# Altium PCB LCT M3 PCB.PcbDoc (part 1 of 2)
Units mm, origin at the board's own origin, x right, y up, seen from the top; angles counter-clockwise.
Board outline 112 x 147.95 mm, 6 copper layers (Top, Gnd, HighSpeed, High speed, Power, Bottom), stack 2.576 mm thick; 249 components, 161 nets, 810 pads, 262 vias.
Unrouted connection lines stored in the file: 3.
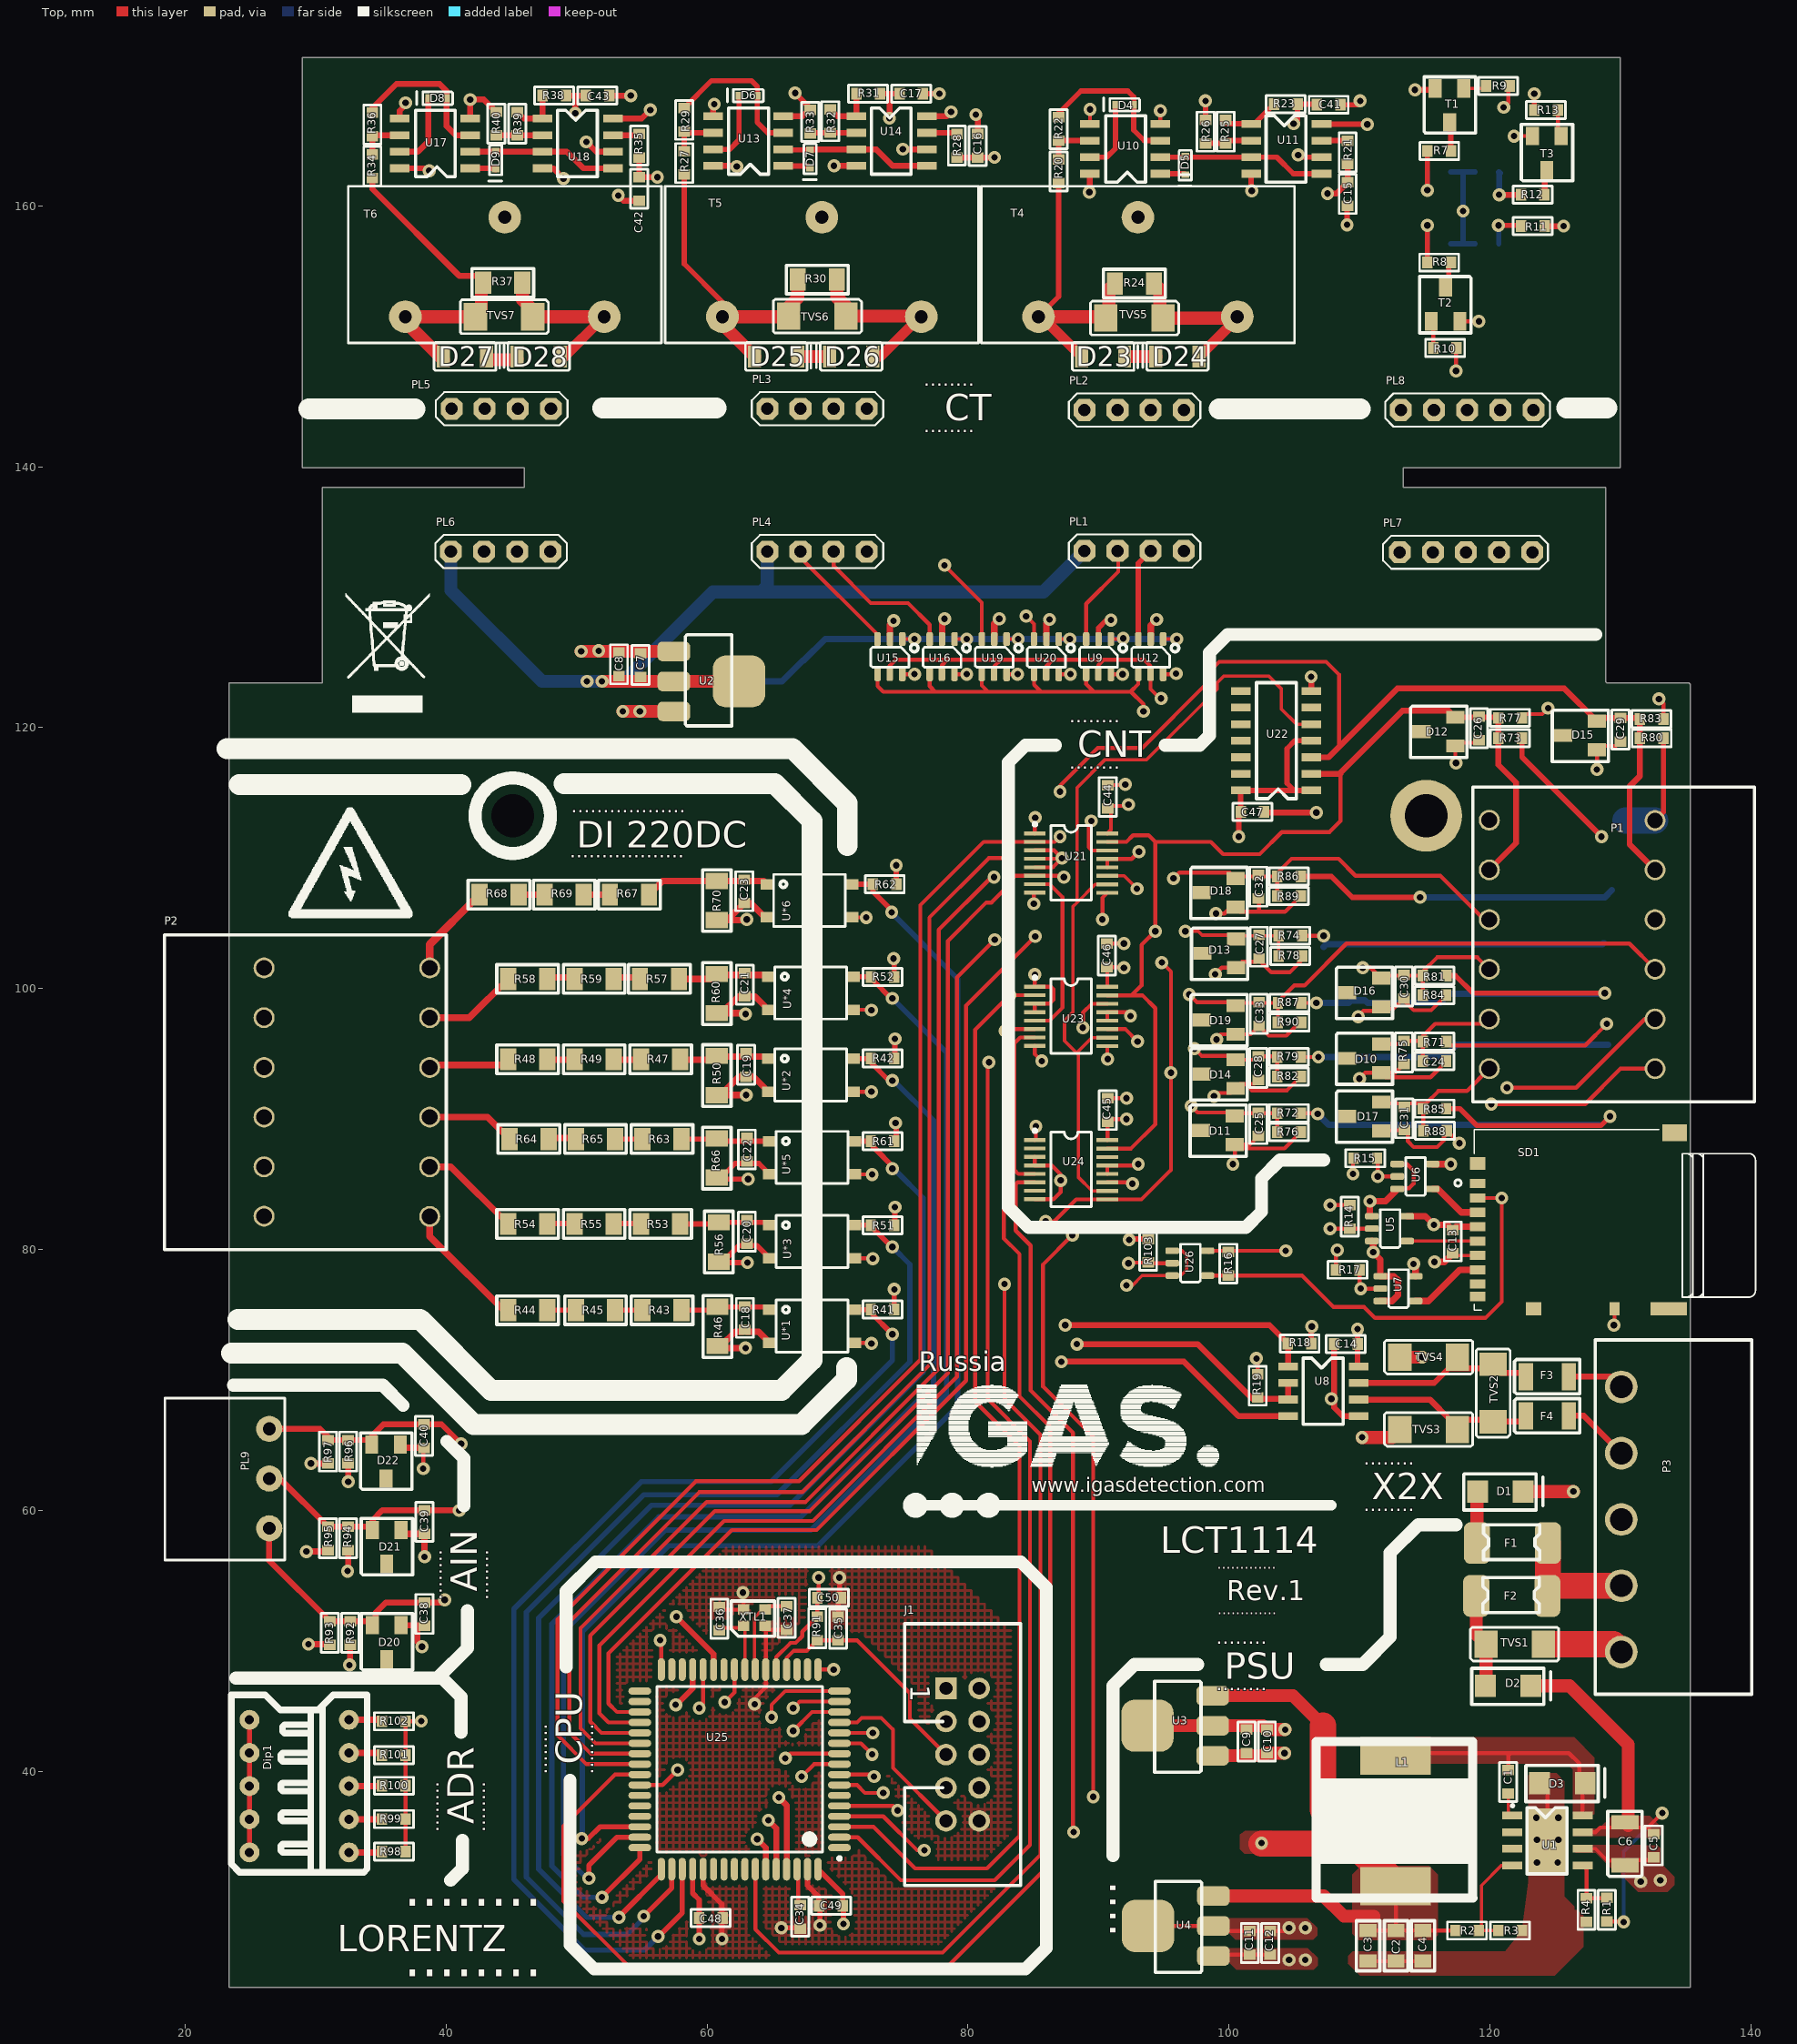
[diagram p0: Top view]
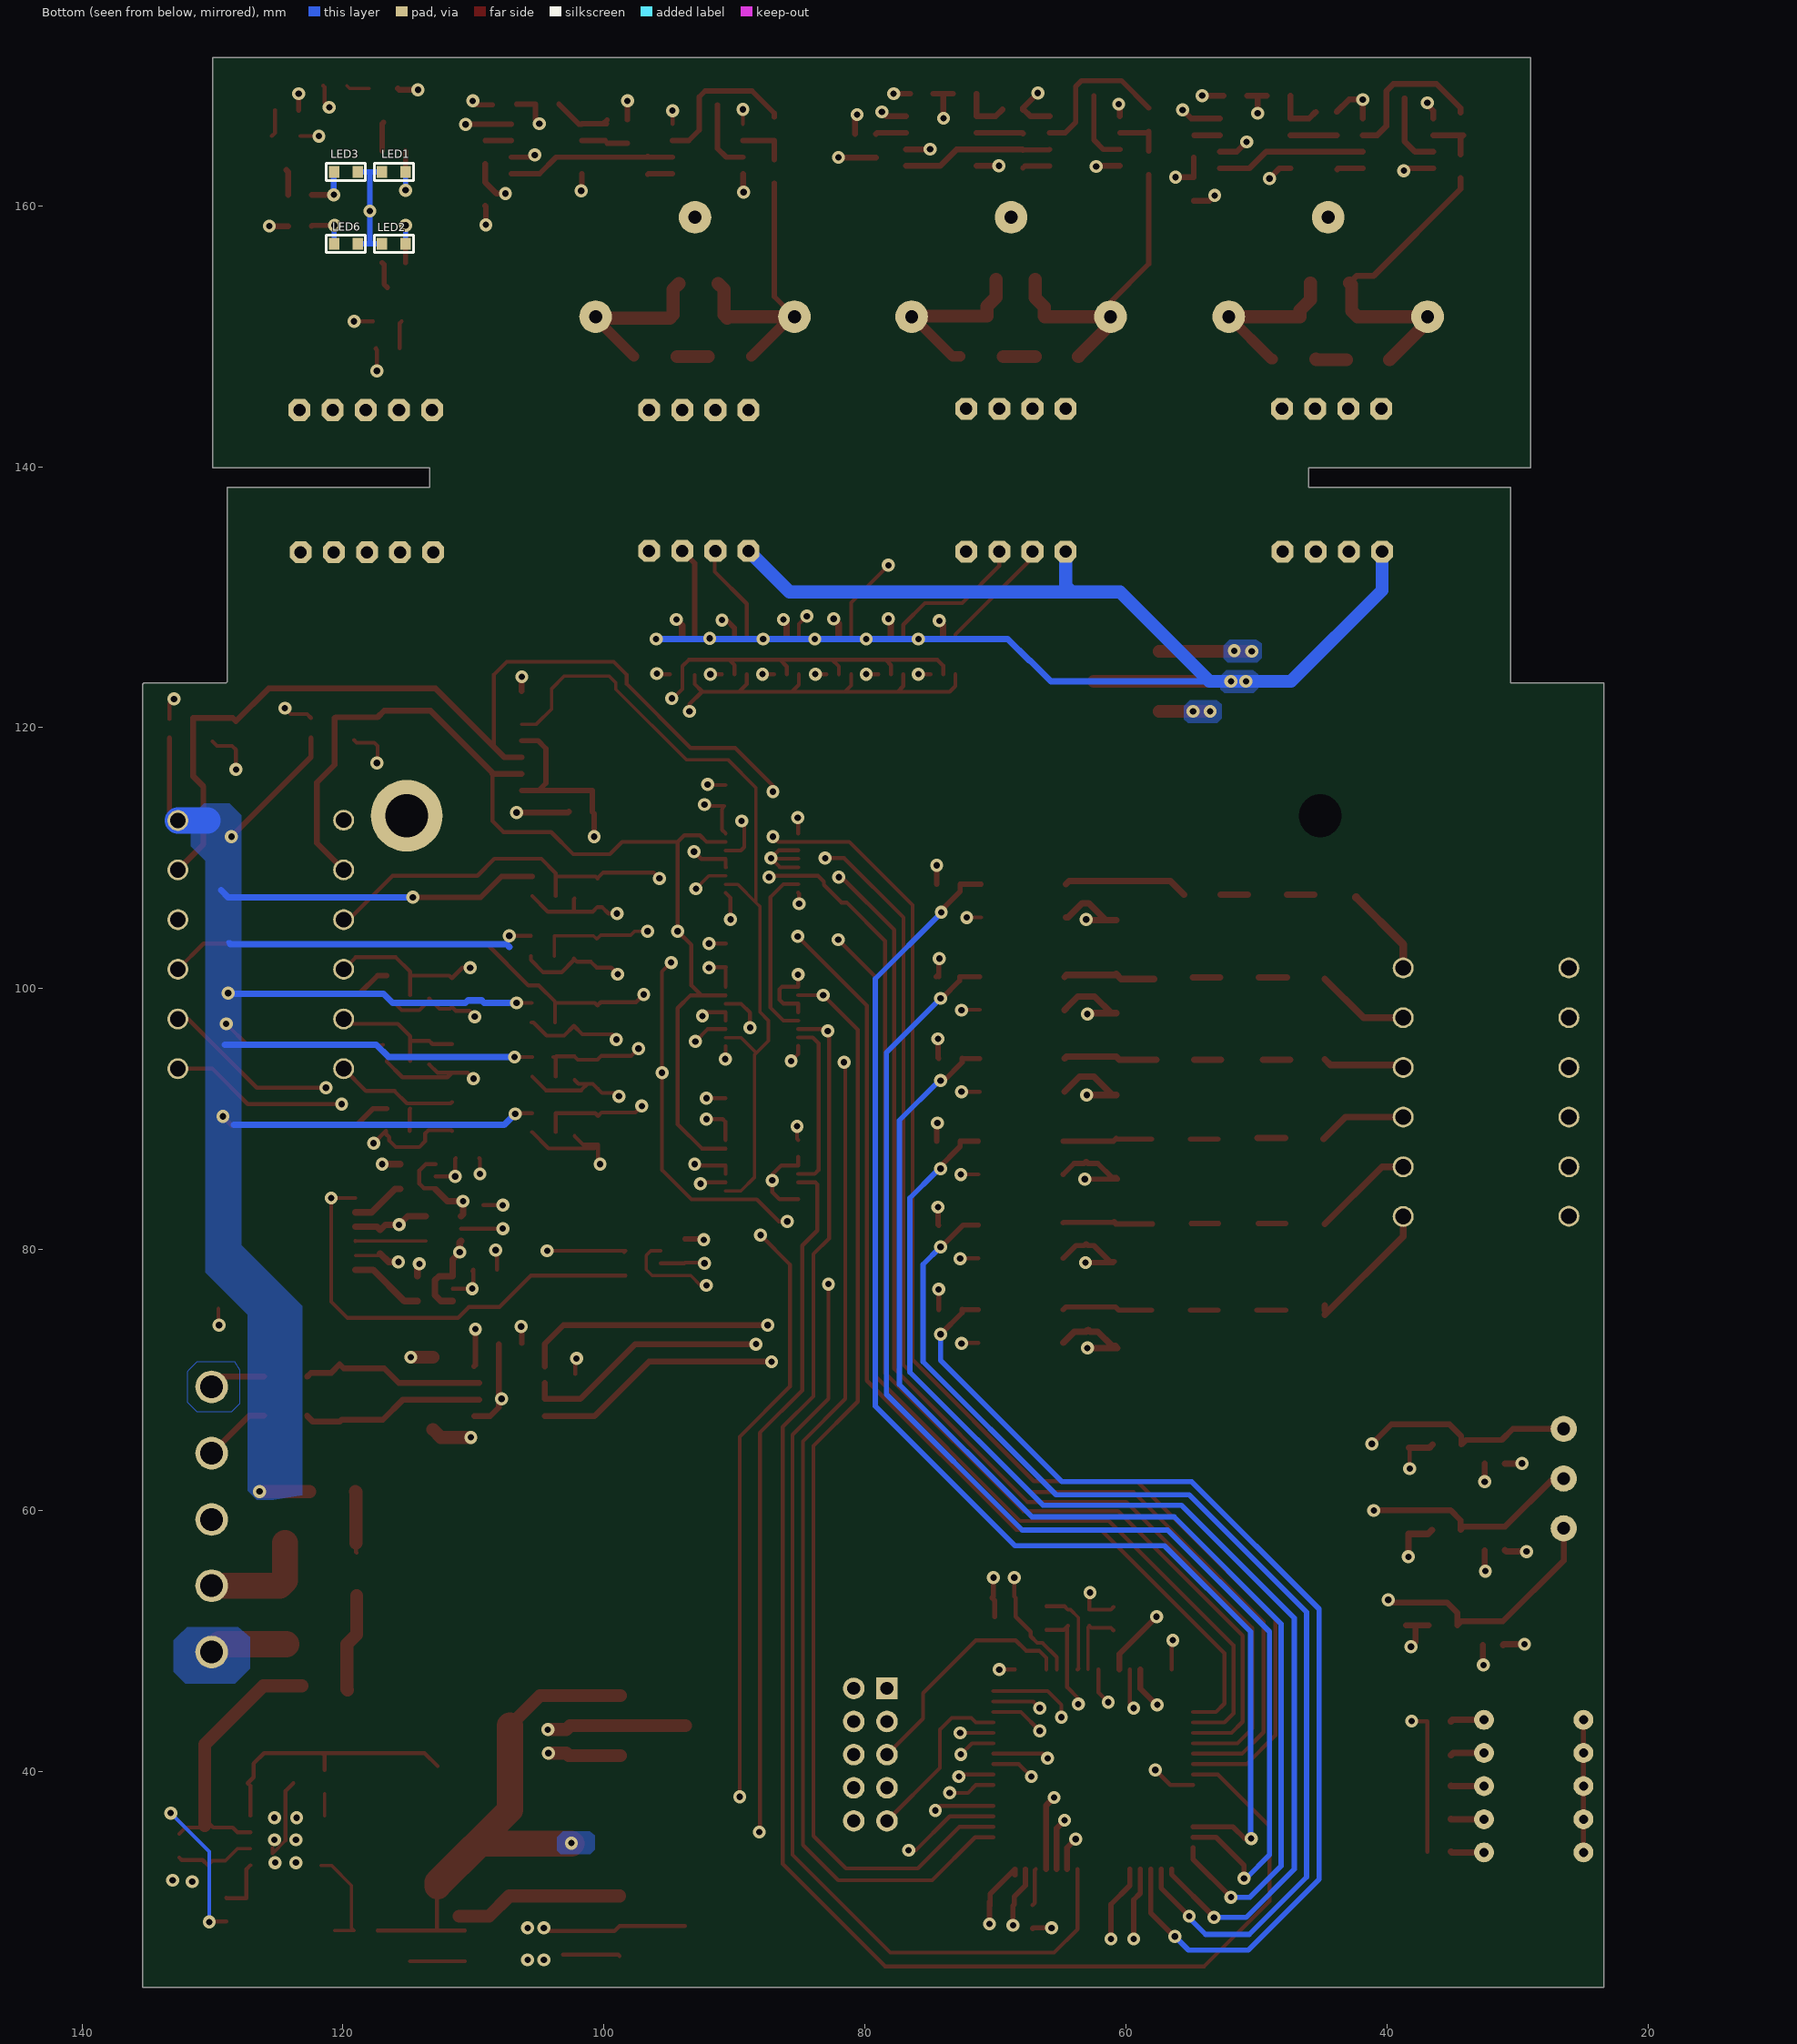
[diagram p1: Bottom view, seen from below]
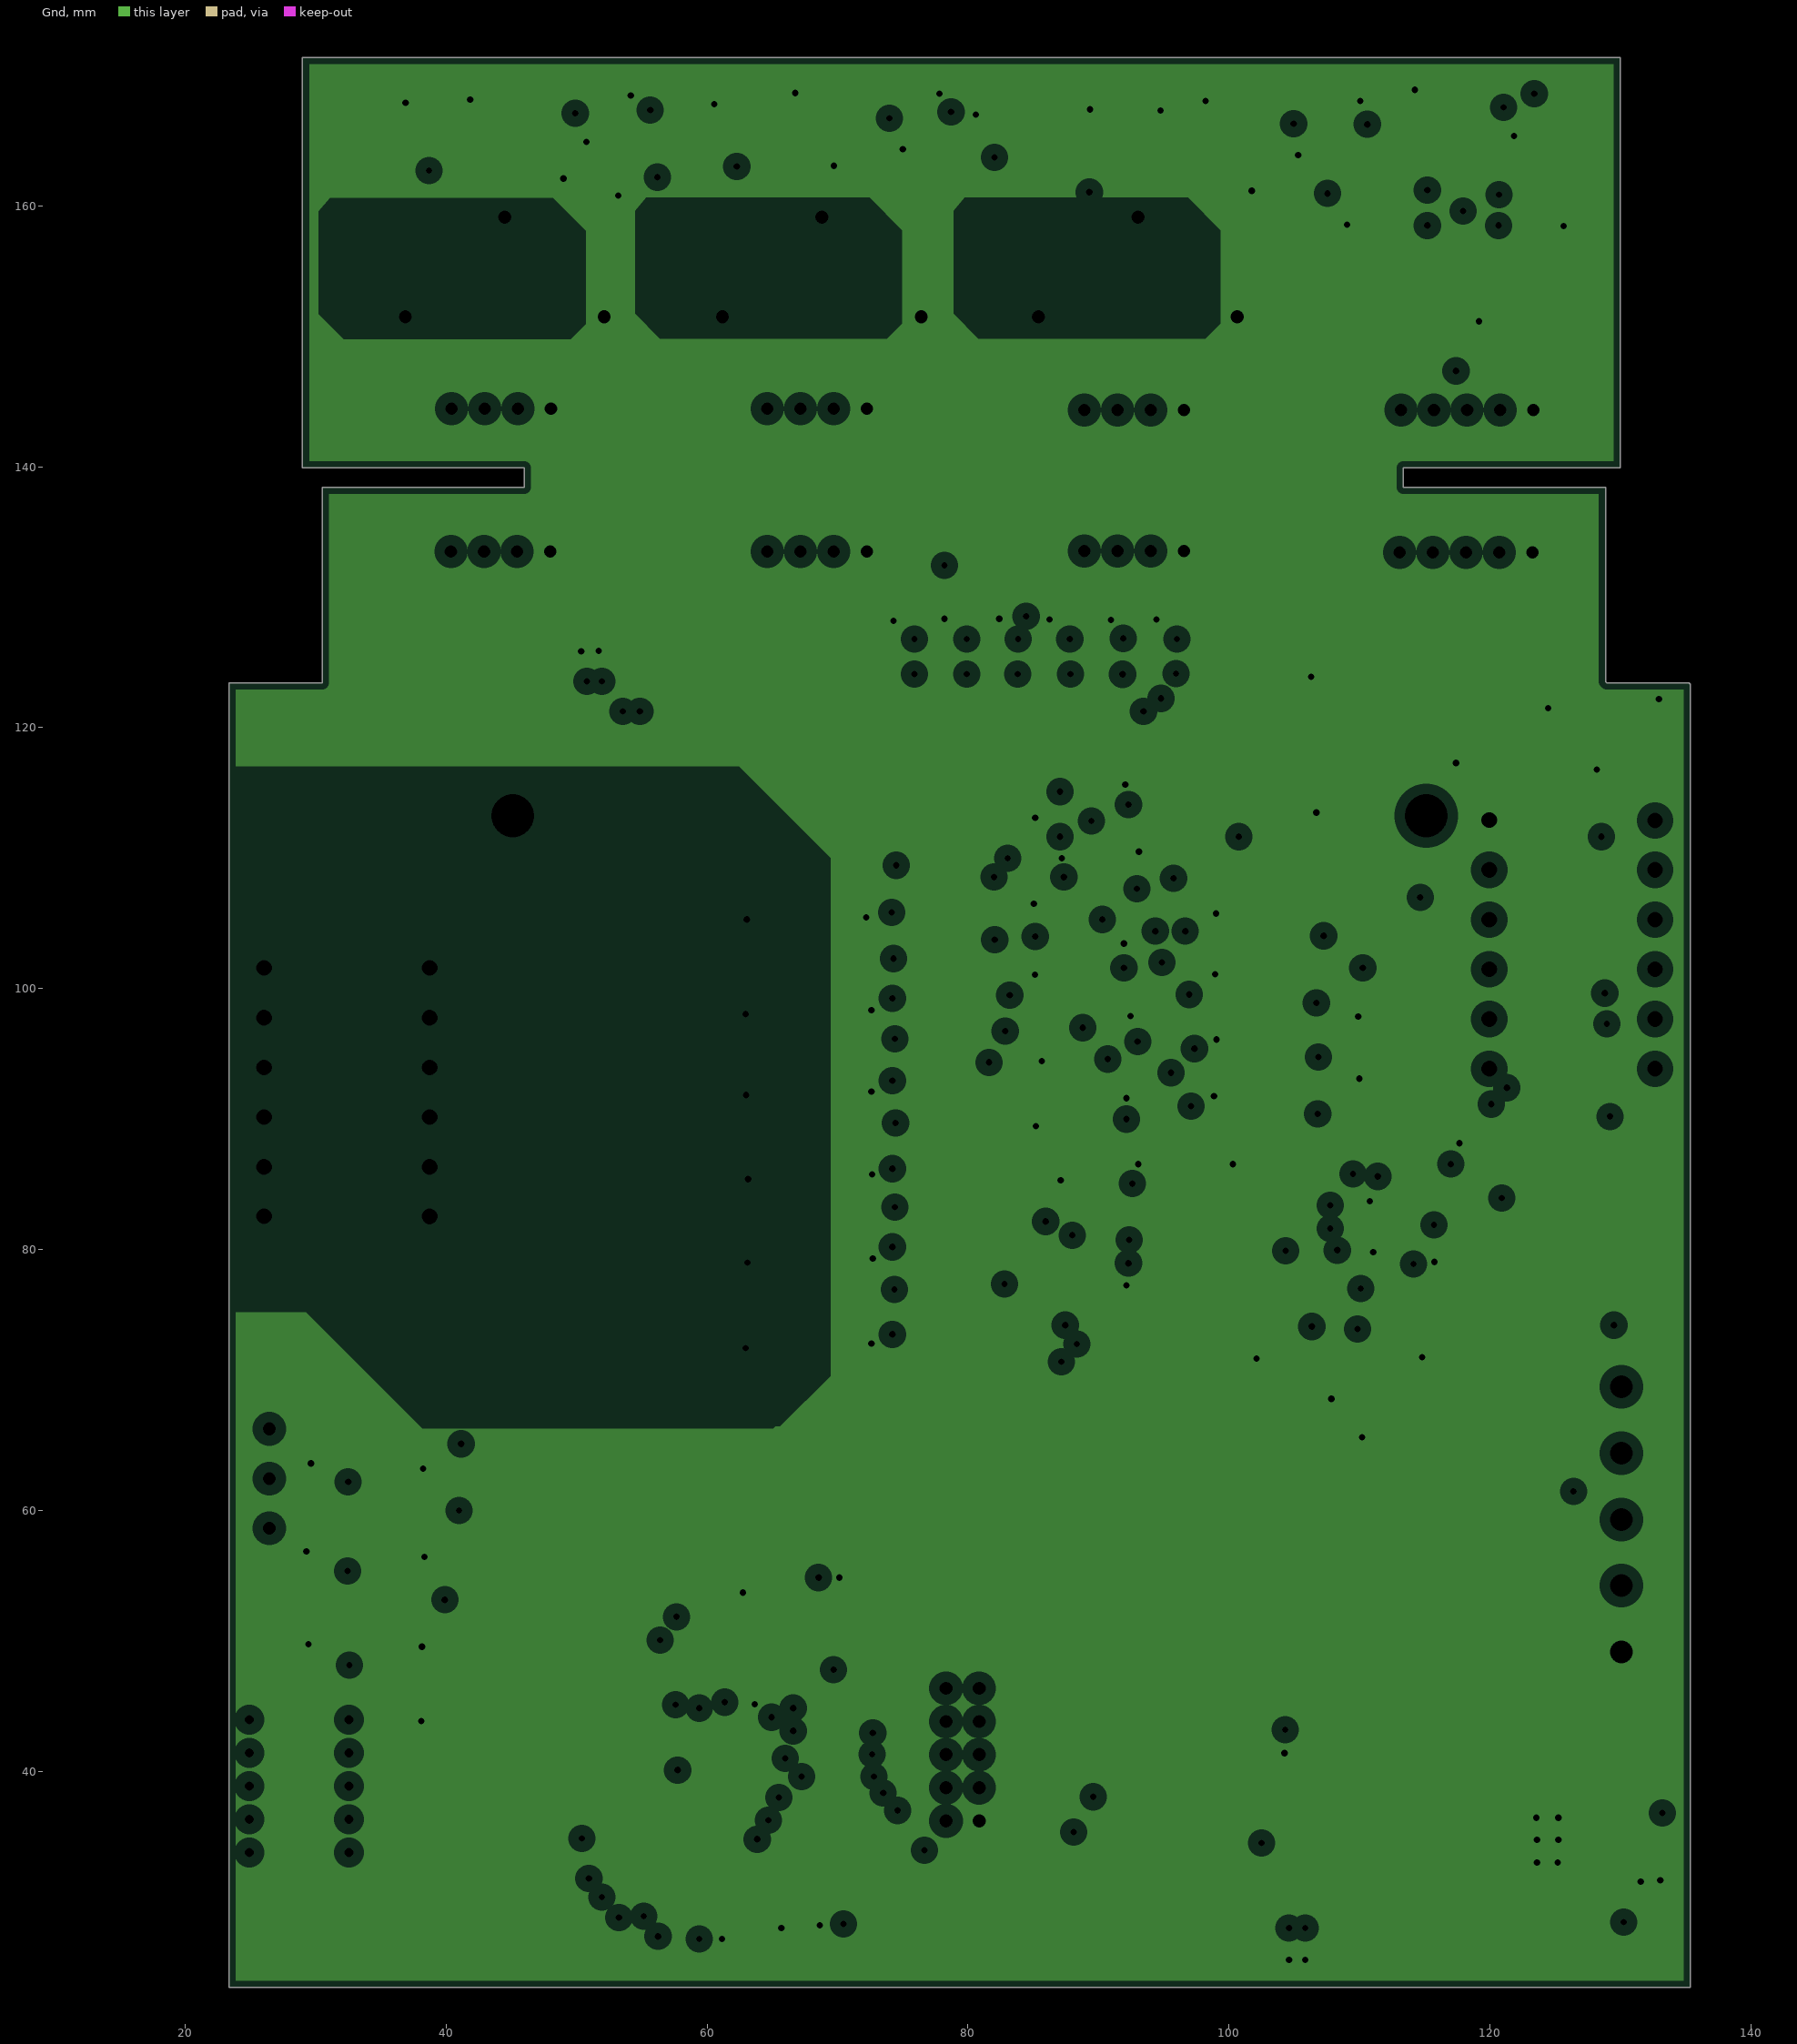
[diagram p2: Gnd, clearances drawn from the general rule]
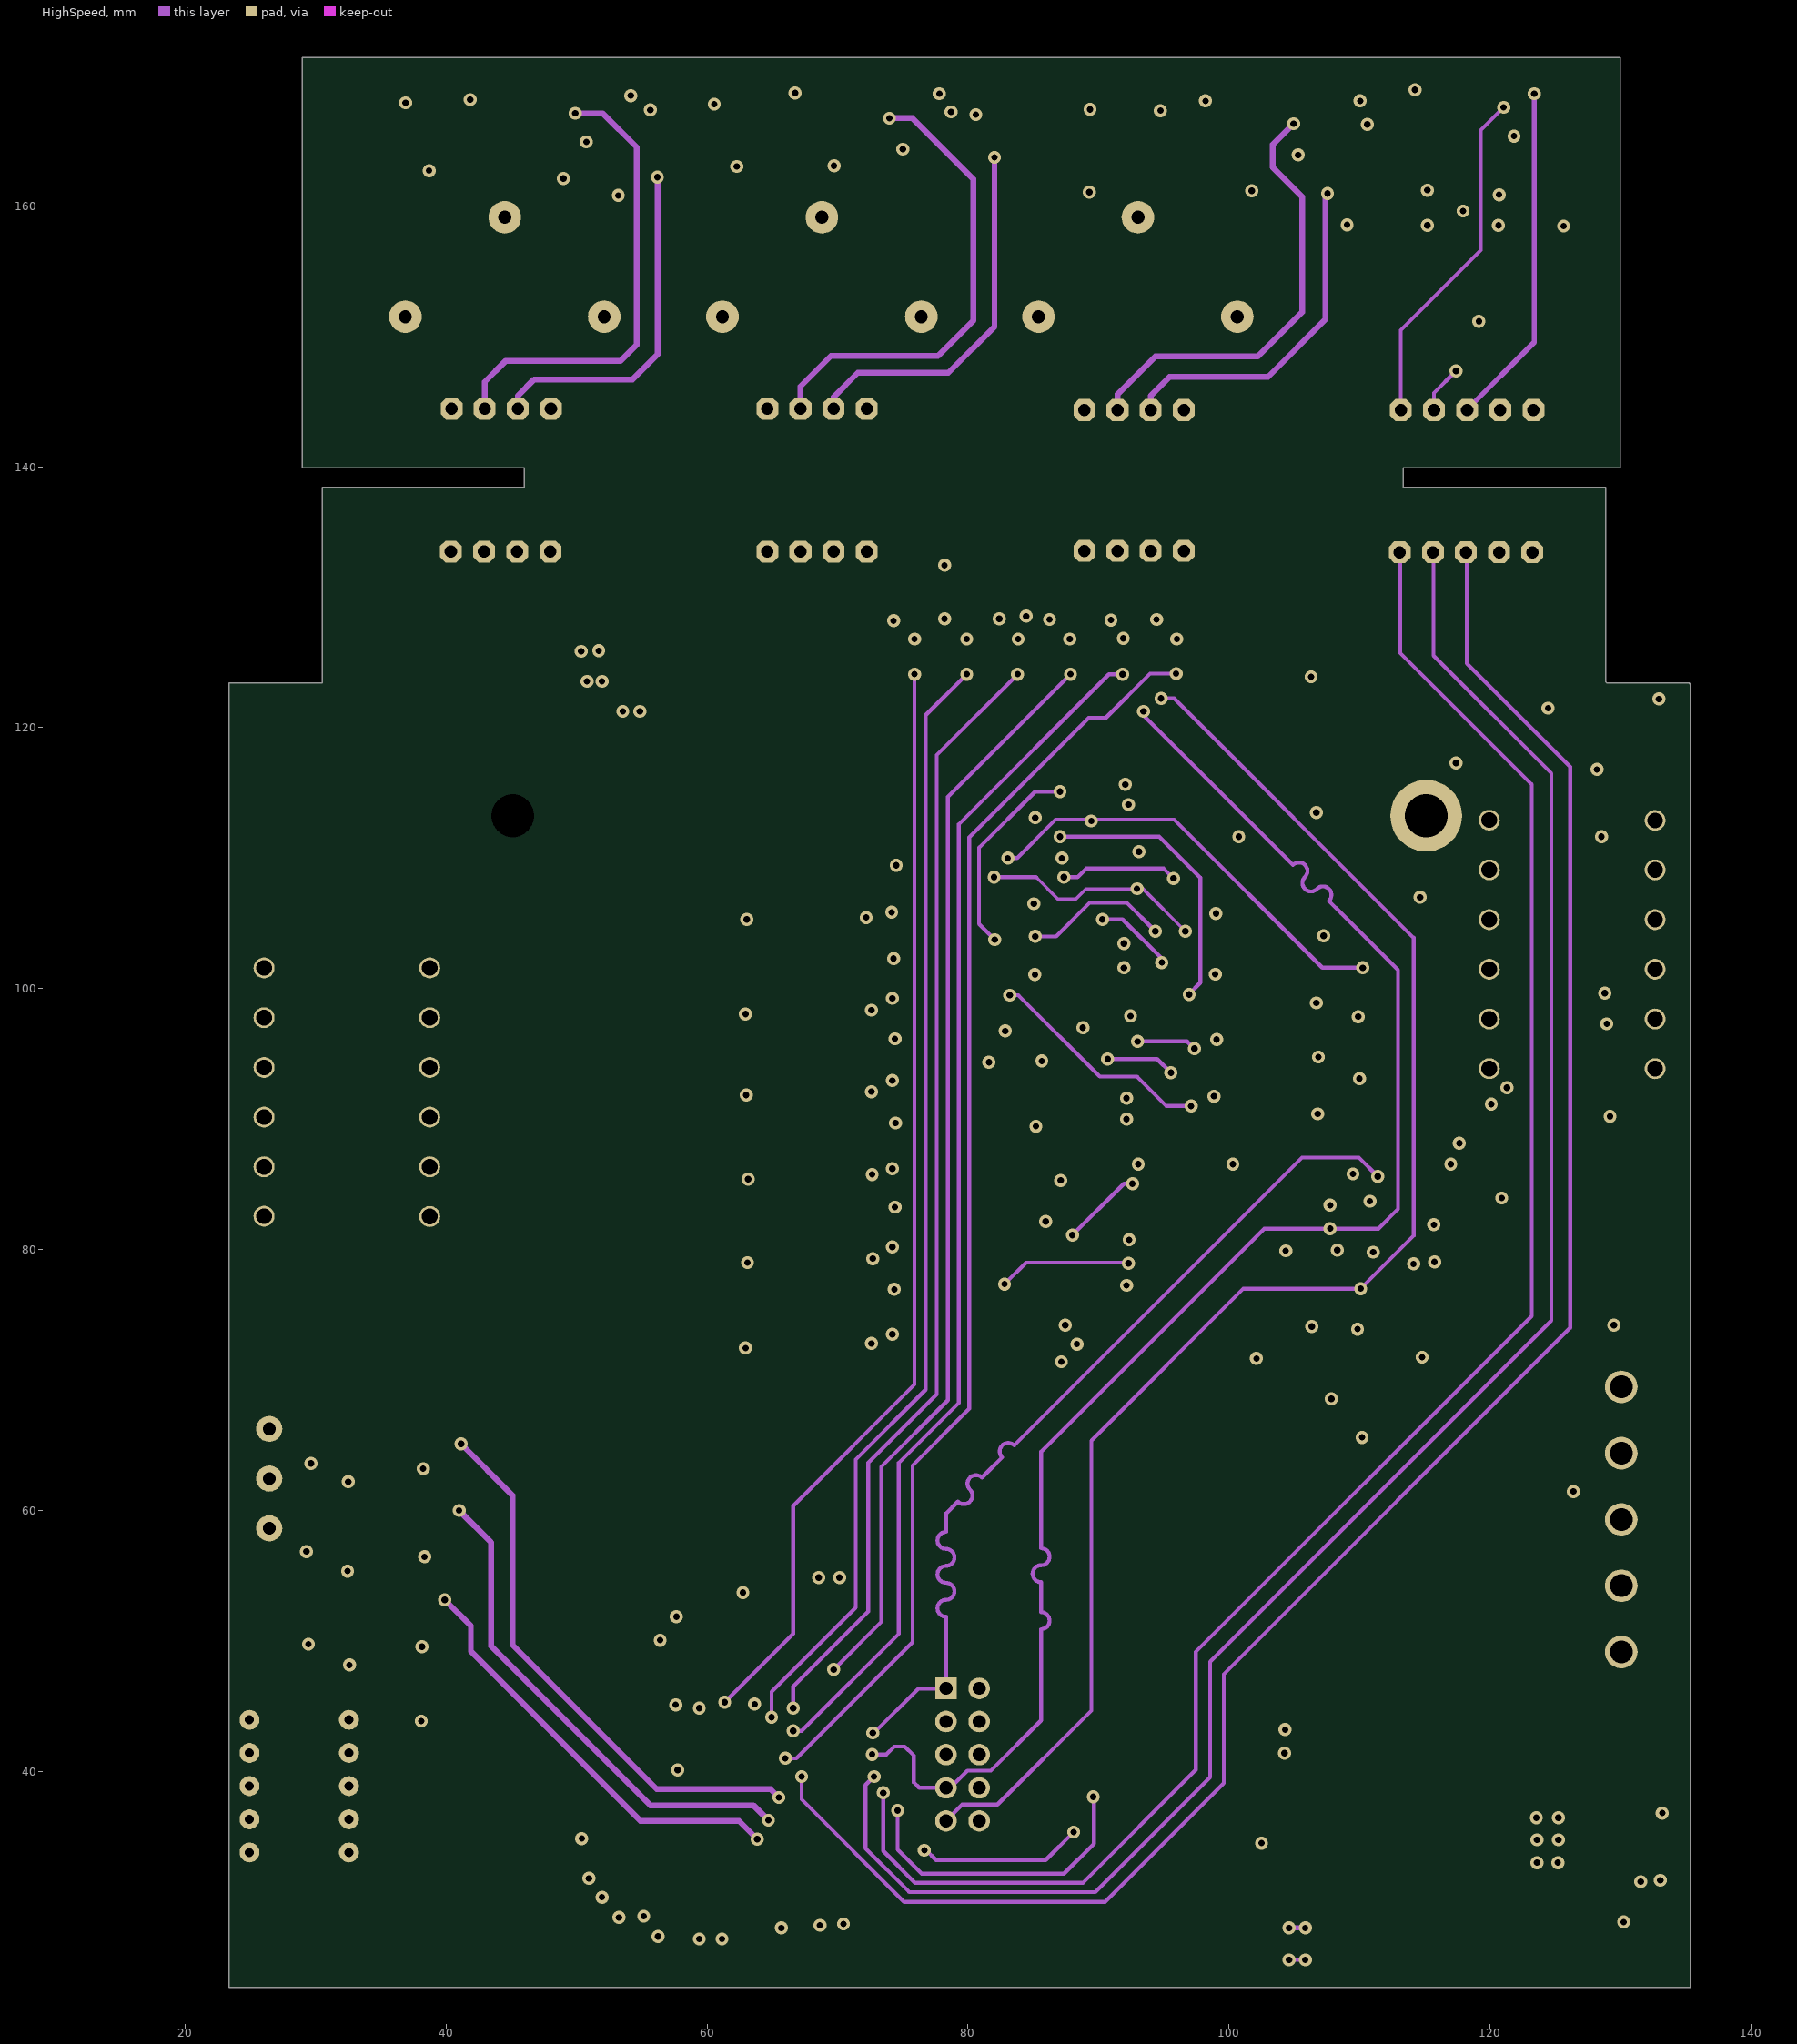
[diagram p3: HighSpeed]
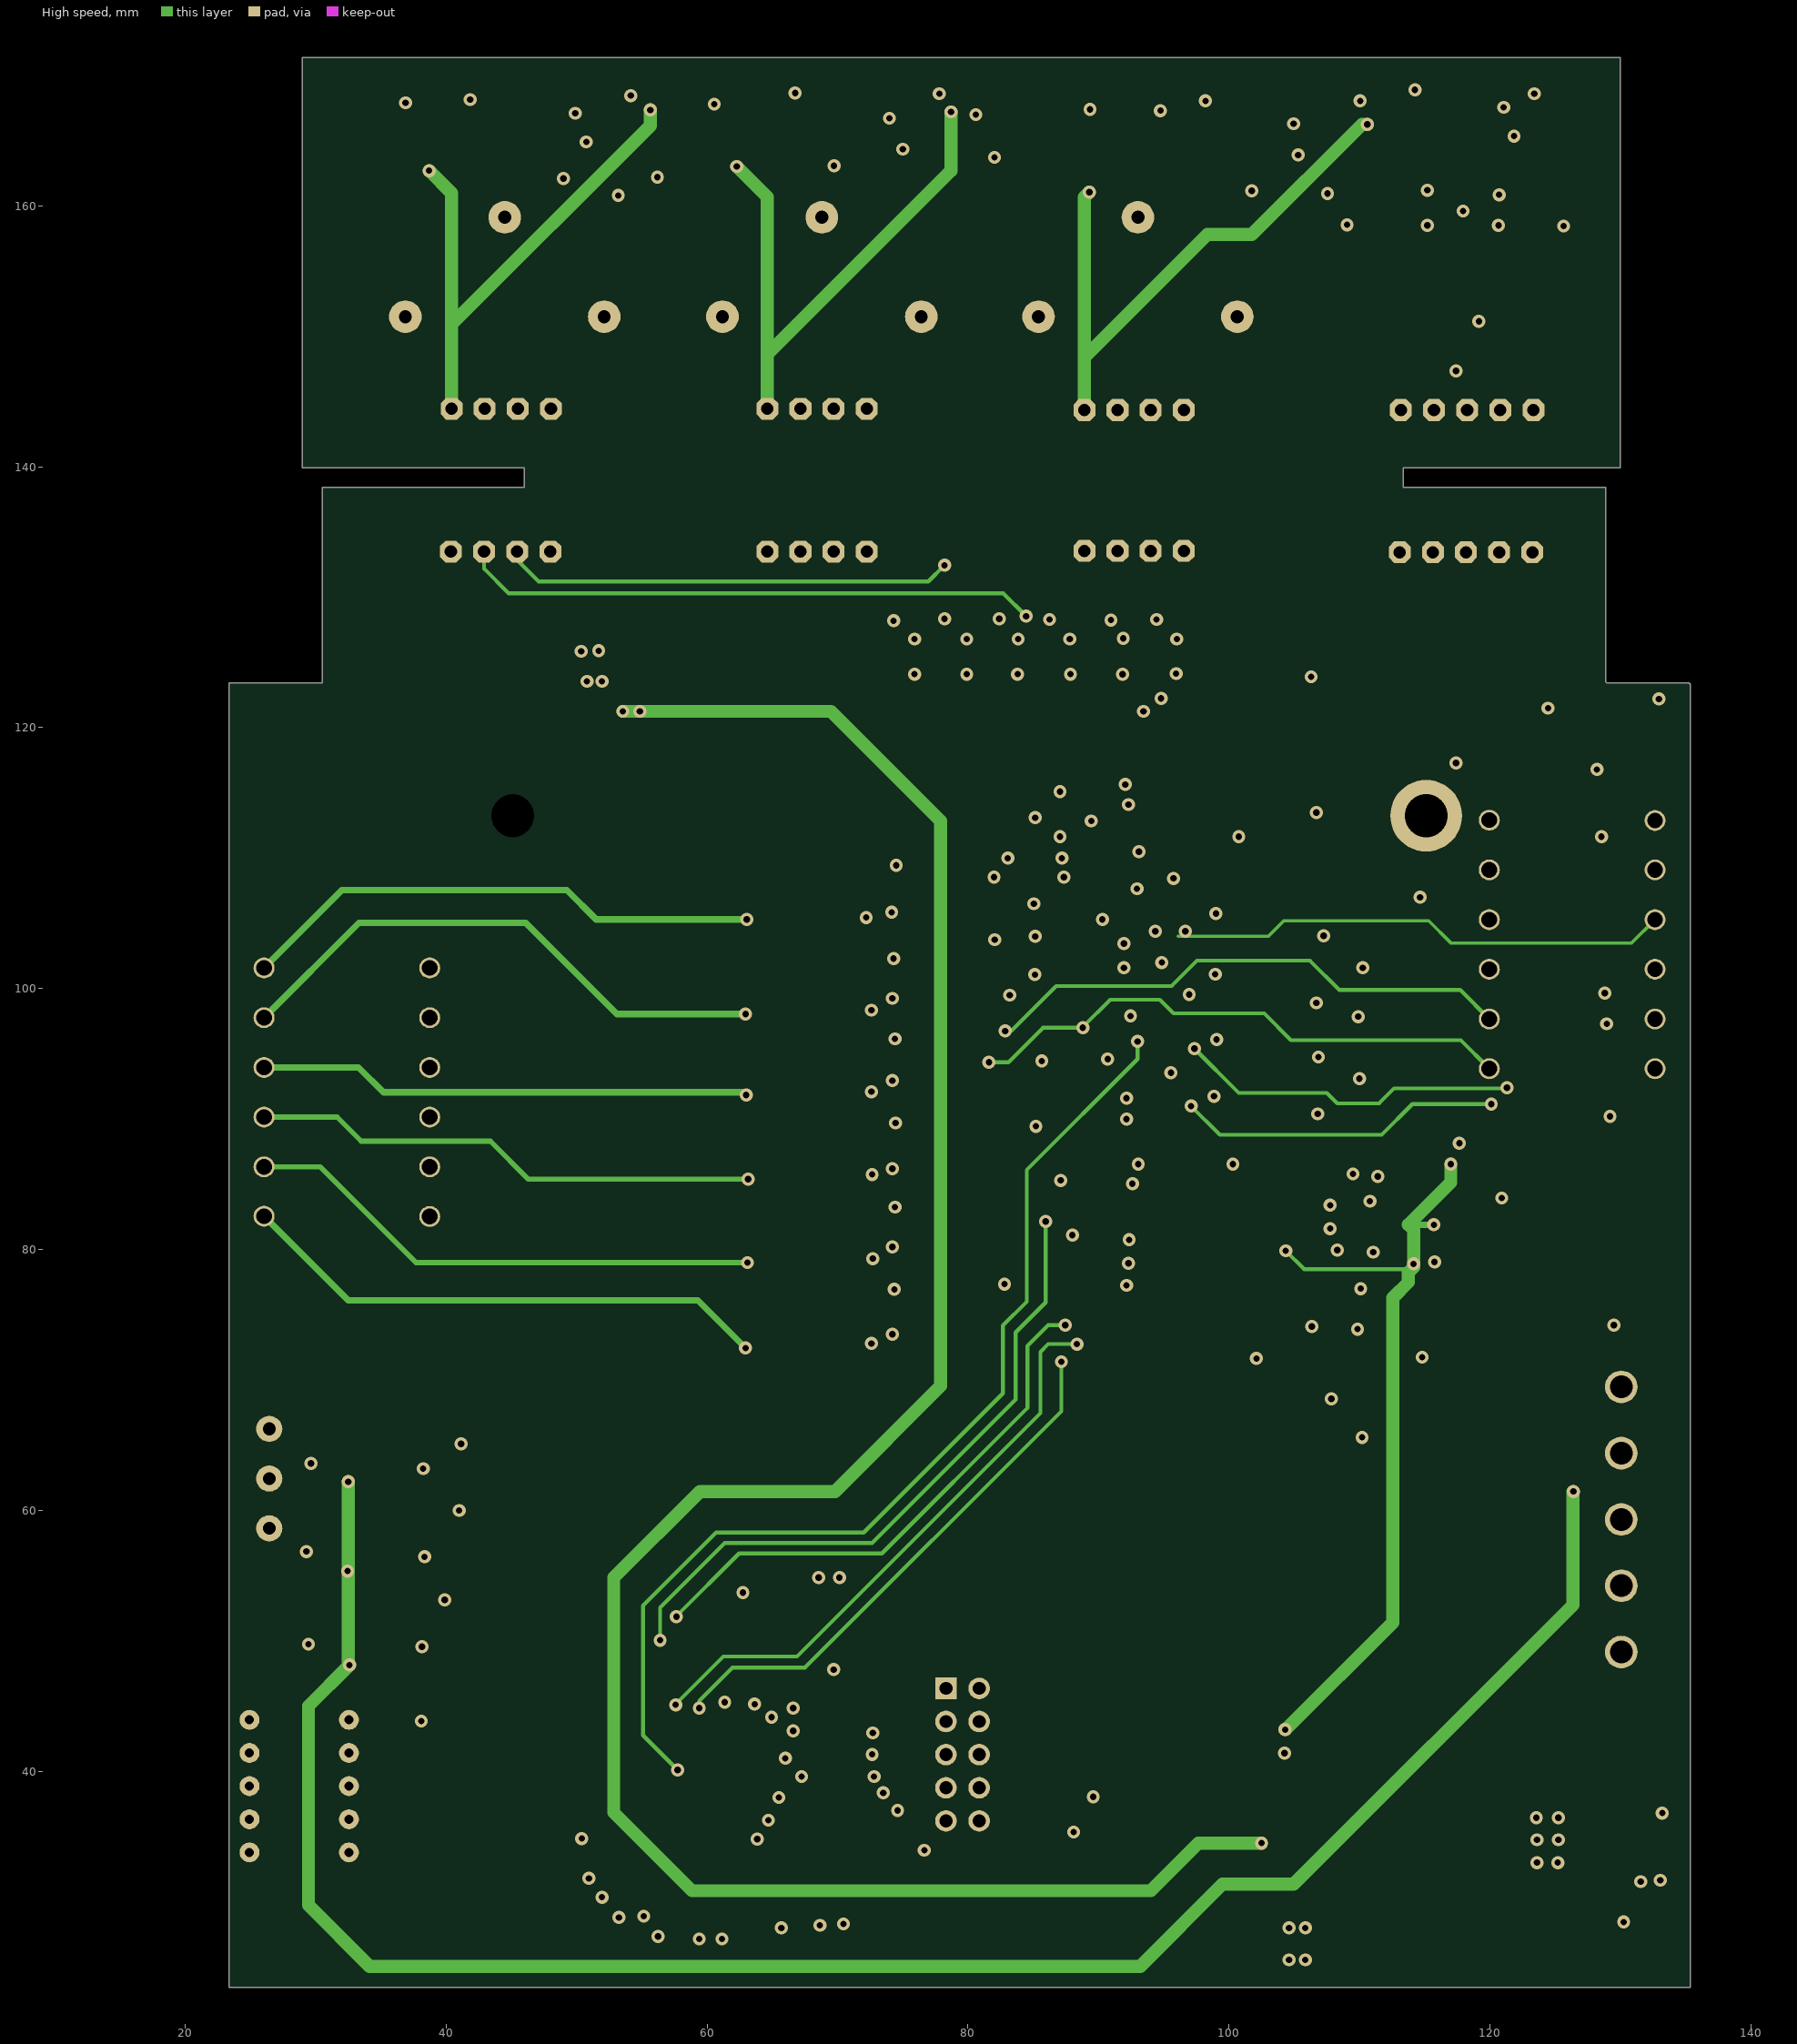
[diagram p4: High speed]
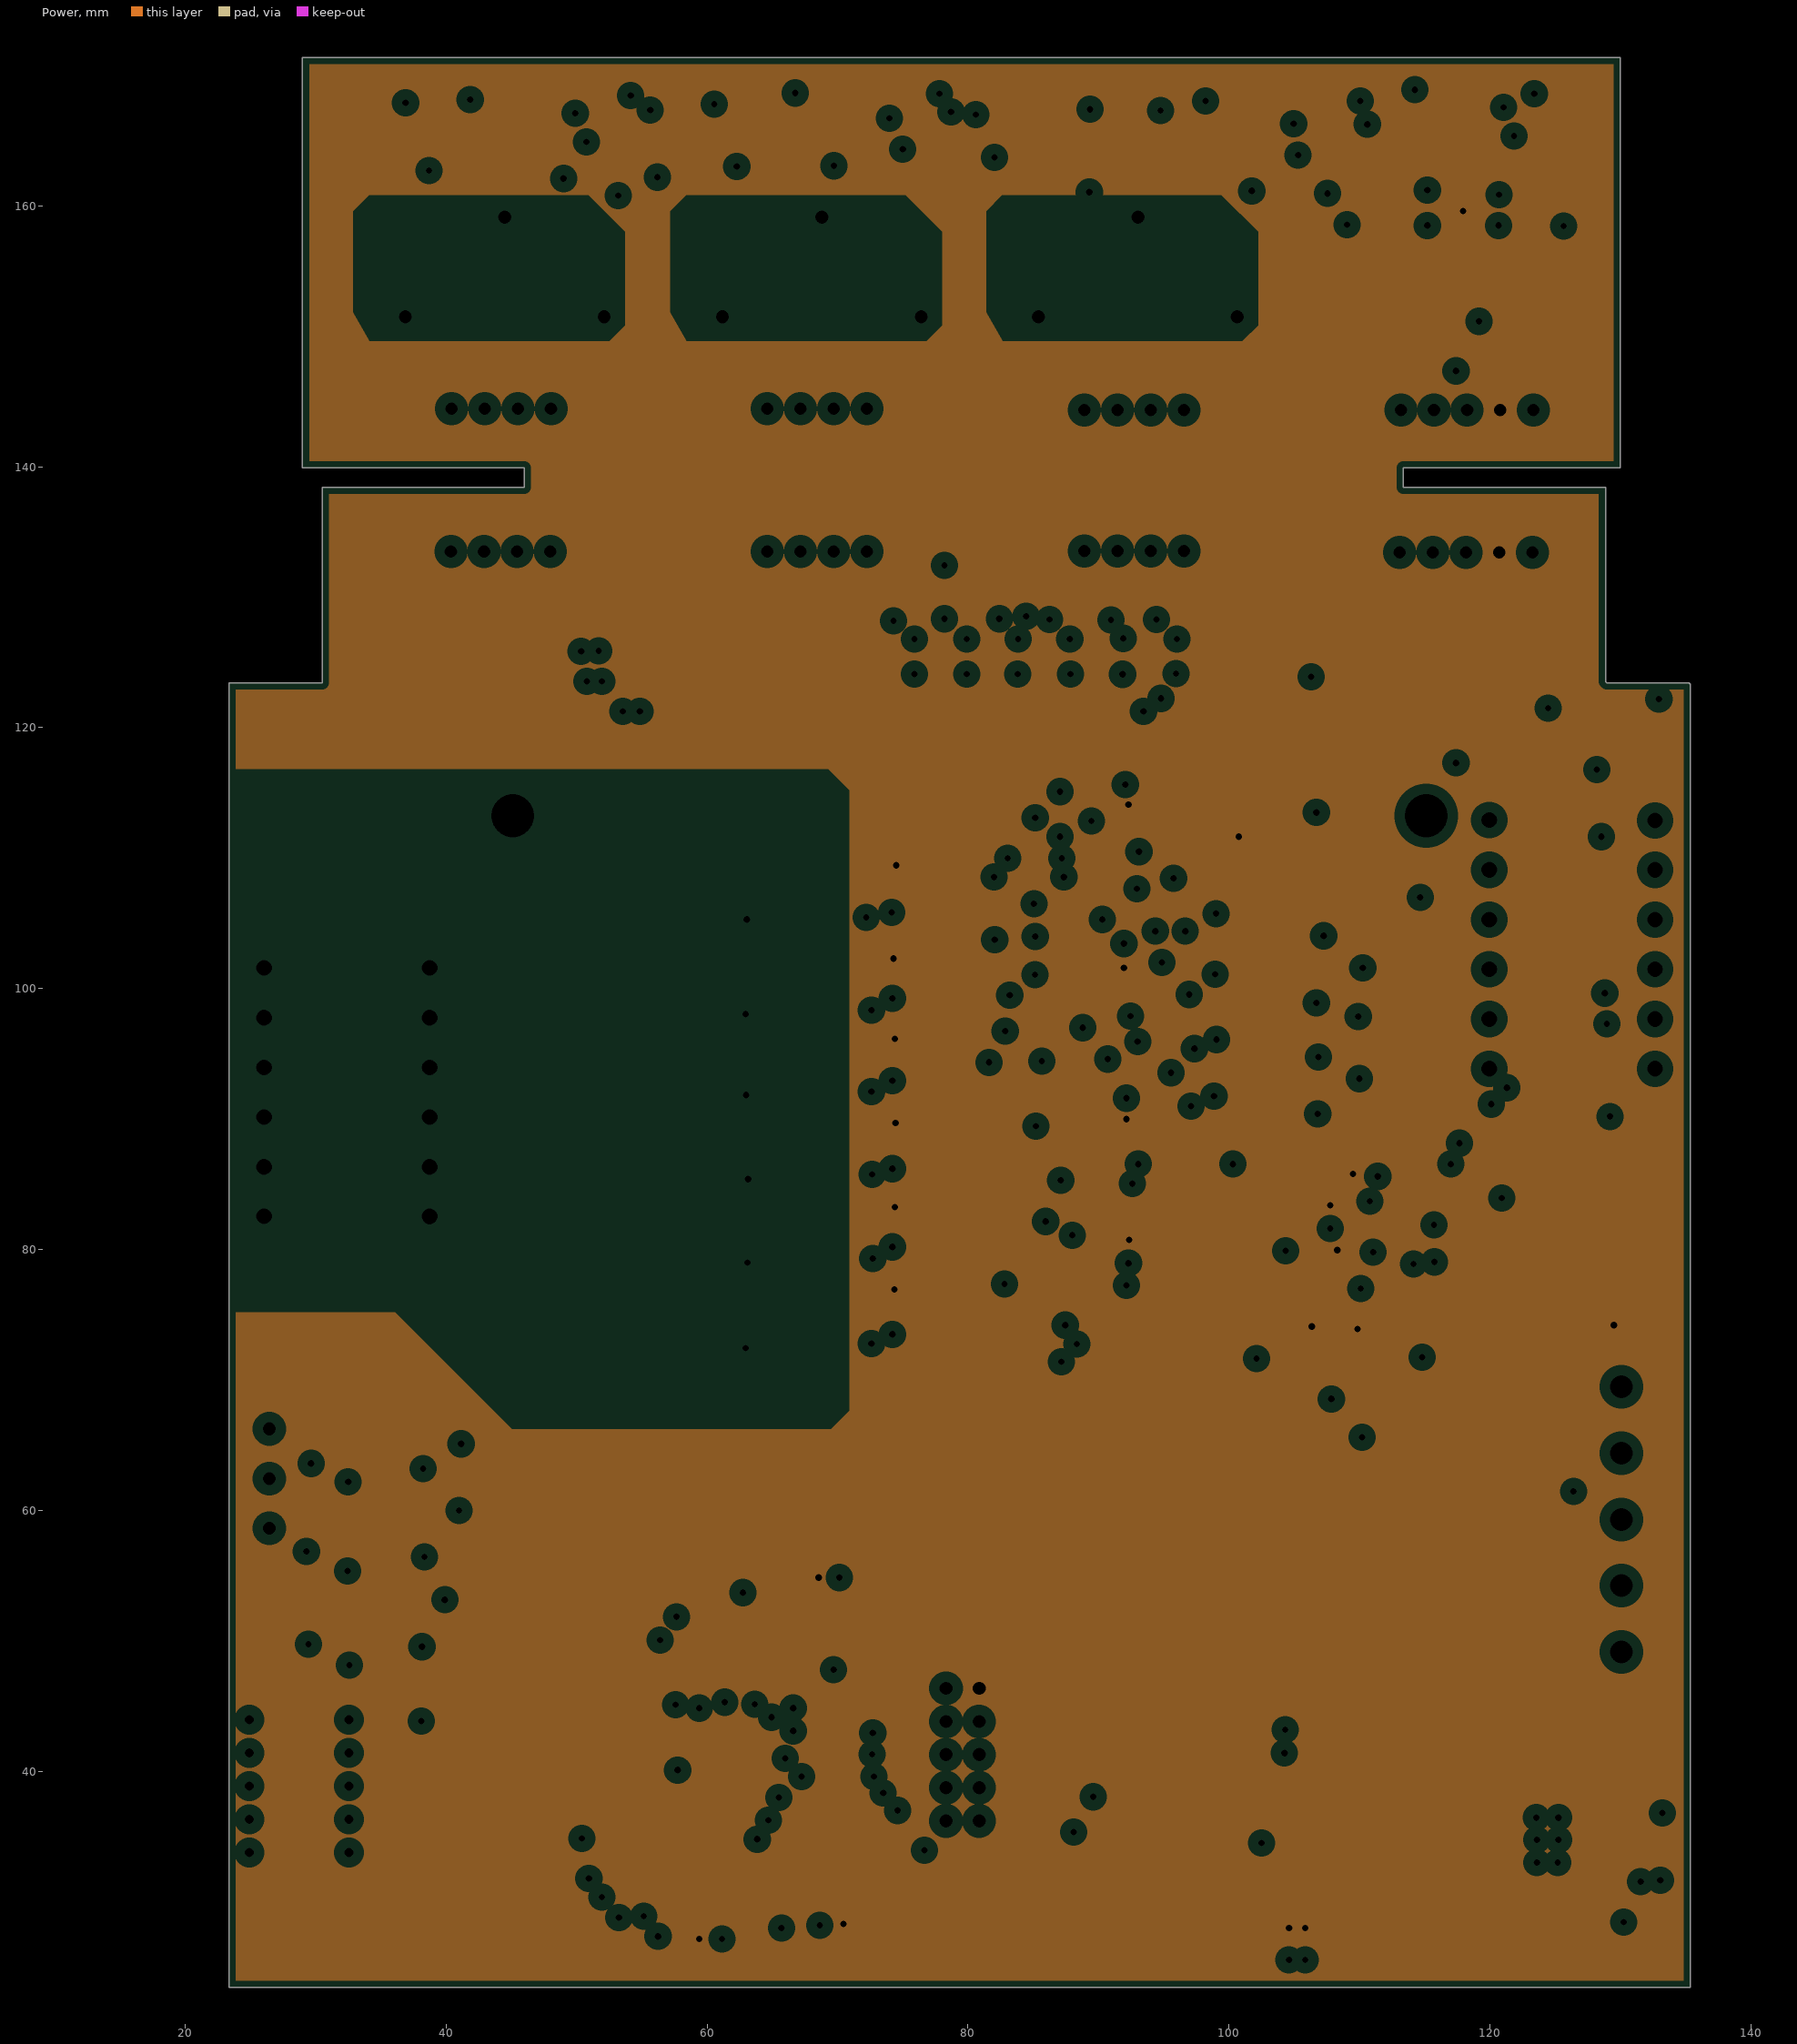
[diagram p5: Power, clearances drawn from the general rule]

## Layer stack, top to bottom
Top Solder: solder mask 0.0102, Solder Resist, Dk 3.5
Top: signal copper 0.035
Gnd: core 1.6, FR-4, Dk 4.8
Gnd: plane copper 0.036, net GND
Dielectric 6: prepreg 0.127, Dk 4.2
HighSpeed: signal copper 0.036
Dielectric 4: prepreg 0.127, Dk 4.2
High speed: signal copper 0.036
Power: core 0.254, Dk 4.2
Power: plane copper 0.036, net +5V Noise
Dielectric 5: core 0.254, Dk 4.2
Bottom: signal copper 0.035
Bottom Solder: solder mask 0.0102, Solder Resist, Dk 3.5

## Board outline
23.353,123.43 30.503,123.43 30.503,138.43 46,138.43 46,139.93 29,139.93 29,171.38 130,171.38 130,139.93 113.361,139.93 113.356,138.43 128.853,138.43 128.853,123.53 128.953,123.43 135.253,123.43 135.353,123.33 135.353,23.43 23.353,23.43

## Design rules (kind name [scope] priority, off if disabled: settings)
Clearance "BGA Clearance" [WithinRoom('BGA')] p1 off: gap=0.08 ignorepadtopadclearanceinfootprint=FALSE
Clearance mdViaVia [IsVia vs IsVia] p2 off: gap=0.21 ignorepadtopadclearanceinfootprint=FALSE except(0: Arc-Hole Track-Hole SMDPad-Hole THPad-Hole Via-Hole Fill-Hole Poly-Hole Region-Hole Text-Hole)
Clearance mdPadVia [IsPad vs IsVia] p3 off: gap=0.21 ignorepadtopadclearanceinfootprint=FALSE except(0: Arc-Hole Track-Hole SMDPad-Hole THPad-Hole Via-Hole Fill-Hole Poly-Hole Region-Hole Text-Hole)
Clearance mdPadPad [IsPad vs IsPad] p4 off: gap=0.21 ignorepadtopadclearanceinfootprint=FALSE except(0: Arc-Hole Track-Hole SMDPad-Hole THPad-Hole Via-Hole Fill-Hole Poly-Hole Region-Hole Text-Hole)
Clearance mdWireVia [(InLayerClass('Signal Layers') AND IsTrack) vs IsVia] p5 off: gap=0.21 ignorepadtopadclearanceinfootprint=FALSE except(0: Arc-Hole Track-Hole SMDPad-Hole THPad-Hole Via-Hole Fill-Hole Poly-Hole Region-Hole Text-Hole)
Clearance mdWirePad [(InLayerClass('Signal Layers') AND IsTrack) vs IsPad] p6 off: gap=0.21 ignorepadtopadclearanceinfootprint=FALSE except(0: Arc-Hole Track-Hole SMDPad-Hole THPad-Hole Via-Hole Fill-Hole Poly-Hole Region-Hole Text-Hole)
Clearance mdWireWire [(InLayerClass('Signal Layers') AND IsTrack) vs (InLayerClass('Signal Layers') AND IsTrack)] p7 off: gap=0.21 ignorepadtopadclearanceinfootprint=FALSE except(0: Arc-Hole Track-Hole SMDPad-Hole THPad-Hole Via-Hole Fill-Hole Poly-Hole Region-Hole Text-Hole)
Clearance [All] p8: gap=0.25 ignorepadtopadclearanceinfootprint=FALSE
ComponentClearance [All] p1 off: gap=0.254 collisioncheckmode=3 verticalgap=0.254 showdistances=FALSE
DiffPairsRouting [All] p1: maxlimit=0.5 minlimit=0.2 mostfreqgap=0.3 toplayer_minwidth=0.15 toplayer_maxwidth=1.381 toplayer_prefwidth=0.2 midlayer1_minwidth=0.15 midlayer1_maxwidth=1.381 midlayer1_prefwidth=0.2 midlayer2_minwidth=0.15 midlayer2_maxwidth=1.381 midlayer2_prefwidth=0.2 bottomlayer_minwidth=0.15 bottomlayer_maxwidth=1.381 bottomlayer_prefwidth=0.2 maxuncoupledlength=1
Height [All] p1 off: minheight=0 maxheight=25.4 prefheight=12.7
HoleSize [All] p1: absolutevalues=TRUE maxlimit=2540 minlimit=0.35 maxpercent=80.000 minpercent=20.000
HoleToHoleClearance [All] p1: gap=0.21 allowstackedmicrovias=TRUE
Length InNet('MOSI') [InNet('MOSI')] p1: maxlimit=60.717 minlimit=0
Length InNet('MISO') [InNet('MISO')] p2: maxlimit=60.717 minlimit=0
Length "InNet('MISO') Or InNet('SPCK')" [InNet('MISO') Or InNet('SPCK')] p3: maxlimit=60.717 minlimit=0
Length "InNet('SDA0-3') Or InNet('SCL0-3')" [InNet('SDA0-3') Or InNet('SCL0-3')] p4: maxlimit=22.577 minlimit=0
Length "InNet('SPCK') Or InNet('MISO')" [InNet('SPCK') Or InNet('MISO')] p5: maxlimit=200.254 minlimit=0
Length "InNet('D-_N') Or InNet('D+_P')" [InNet('D-_N') Or InNet('D+_P')] p6: maxlimit=50.284 minlimit=0
Length "InNet('R-_P') Or InNet('D+_P')" [InNet('R-_P') Or InNet('D+_P')] p7: maxlimit=50.284 minlimit=0
Length "InNet('MOSI') Or InNet('SPCK')" [InNet('MOSI') Or InNet('SPCK')] p8: maxlimit=29.83 minlimit=0
Length InNet('TX_P') [InNet('TX_P')] p9: maxlimit=11.343 minlimit=0
MinimumSolderMaskSliver [All] p1 off: minsoldermaskwidth=0.254
NetAntennae [All] p1 off: netantennaetolerance=0
PasteMaskExpansion [All] p1 off: expansion=0.076
PlaneClearance [All] p1: clearance=0.8
PlaneConnect [All] p1: planeconnectstyle=Relief reliefexpansion=0.508 reliefentries=4 reliefconductorwidth=0.4 reliefairgap=0.6
PolygonConnect ThermalVias [IsVia] p1: connectstyle=Direct reliefconductorwidth=0.254 reliefentries=4 polygonreliefangle="90 Angle" airgapwidth=0.254
PolygonConnect [All] p2: connectstyle=Direct reliefconductorwidth=0.254 reliefentries=4 polygonreliefangle="90 Angle" airgapwidth=0.254
RoutingVias "BGA via" [WithinRoom('BGA')] p1: holewidth=0.25 width=0.45 viastyle="Through Hole" minholewidth=0.25 minwidth=0.45 maxholewidth=0.25 maxwidth=0.45
RoutingVias [All] p2: holewidth=0.6 width=1.2 viastyle="Through Hole" minholewidth=0.4 minwidth=0.9 maxholewidth=0.711 maxwidth=1.4
SilkToBoardRegionClearance [All] p1 off:
SilkToSilkClearance [All] p1 off: silktosilkclearance=0.1
SilkToSolderMaskClearance [IsPad] p1 off: minsilkscreentomaskgap=0.254 clearancetoexposedcopper=TRUE
SolderMaskExpansion [All] p1 off: expansion=0.051
SupplyNets [All] p1: voltage=0,000
Width "BGA width" [WithinRoom('BGA')] p1 off: maxlimit=0.5 minlimit=0.08 preferedwidth=0.15
Width [All] p2: maxlimit=2540 minlimit=0.25 preferedwidth=0.25
17 further rules are at their usual default settings.

## Classes and differential pairs
component class "Solenoid Current Detector": C38 C39 C40 D20 D21 D22 R92 R93 R94 R95 R96 R97
component class MCU: C34 C35 C36 C37 C48 C49 C50 Dip1 J1 R91 R98 R99 R100 R101 R102 U25 XTL1
component class "Encoder AFE": C24 C25 C26 C27 C28 C29 C30 C31 C32 C33 D10 D11 D12 D13 D14 D15 D16 D17 D18 D19 R71 R72 R73 R74 R75 R76 R77 R78 R79 R80 R81 R82 R83 R84 R85 R86 R87 R88 R89 R90
component class "Encoder AFE incremental": C44 C45 C46 C47 U21 U22 U23 U24
component class "Transformer FrontEnd 3": C42 C43 D8 D9 D27 D28 PL5 PL6 R34 R35 R36 R37 R38 R39 R40 T6 TVS7 U17 U18 U19 U20
component class "Transformer FrontEnd 2": C16 C17 D6 D7 D25 D26 PL3 PL4 R27 R28 R29 R30 R31 R32 R33 T5 TVS6 U13 U14 U15 U16
component class "Transformer FrontEnd 1": C15 C41 D4 D5 D23 D24 PL1 PL2 R20 R21 R22 R23 R24 R25 R26 T4 TVS5 U9 U10 U11 U12
component class RS485: C14 F3 F4 R18 R19 TVS2 TVS3 TVS4 U8
component class LEDs: LED1 LED2 LED3 LED6 LED? PL7 PL8 R7 R8 R9 R10 R11 R12 R13 T1 T2 T3
component class Digital_Inputs: 1 C18 C19 C20 C21 C22 C23 LG1 LG2 LG4 LG5 LG6 LG7 LG8 LG9 R41 R42 R43 R44 R45 R46 R47 R48 R49 R50 R51 R52 R53 R54 R55 R56 R57 R58 R59 R60 R61 R62 R63 R64 R65 R66 R67 R68 R69 R70 U*1 U*2 U*3 U*4 U*5 U*6
component class "SD Holder": C13 R14 R15 R16 R17 R103 SD1 U5 U6 U7 U26
component class Plugs: P1 P2 P3 PL9
component class "Power Supply": C1 C2 C3 C4 C5 C6 C7 C8 C9 C10 C11 C12 D1 D2 D3 F1 F2 L1 R1 R2 R3 R4 TVS1 U1 U2 U3 U4

## Components (designator, comment, footprint, x,y, rotation, side; value= is the part's Value field where it differs from the comment)
C1 "10n" 0603 121.4,40.1 r180 top
C2 "22uF" 0805 112.8,25.45 r0 top value="100 нФ"
C3 "22uF" 0805 110.65,25.45 r0 top value="100 нФ"
C4 "22uF" 0805 114.85,25.45 r0 top value="100 нФ"
C5 "100n" 0603 132.55,33.4 r0 top
C6 "10uF" 1210 130.35,36.1 r180 top
C7 "100n" 0603 54.9,123.897 r0 top
C8 "10uF" 0603 53.25,123.95 r0 top
C9 "100n" 0603 101.35,43.2 r180 top
C10 "10uF" 0603 102.9,43.2 r180 top
C11 "100n" 0603 101.6,27.75 r180 top
C12 "10uF" 0603 103.15,27.753 r180 top
C13 "100n" 0603 117.15,79.7 r0 top
C14 "100n" 0603 109.853,72.75 r90 top
C15 "100n" 0603 109.097,160 r0 top
C16 "100n" 0603 80.75,165.5 r180 top
C17 "100n" 0603 76.553,168.6 r90 top
C18 "100n" 0603 62.9,73.847 r0 top
C19 "100n" 0603 63,93.247 r0 top
C20 "100n" 0603 63.05,80.45 r0 top
C21 "100n" 0603 62.9,99.397 r0 top
C22 "100n" 0603 63.05,86.75 r0 top
C23 "100n" 0603 62.85,106.55 r0 top
C24 "100n" 0603 116.65,94.45 r90 top
C25 "100n" 0603 102.25,88.697 r0 top
C26 "100n" 0603 119.15,119.05 r0 top
C27 "100n" 0603 102.3,102.297 r0 top
C28 "100n" 0603 102.25,92.997 r0 top
C29 "100n" 0603 130,118.947 r0 top
C30 "100n" 0603 113.4,99.247 r0 top
C31 "100n" 0603 113.45,89.147 r0 top
C32 "100n" 0603 102.25,106.9 r0 top
C33 "100n" 0603 102.3,97.147 r0 top
C34 "100n" 0603 67.15,27.947 r0 top
C35 "100n" 0603 70.05,51.85 r180 top
C36 "18p" 0603 60.95,52.603 r180 top
C37 "18p" 0603 66.1,50.847 r0 top
C38 "100n" 0603 38.35,51.147 r0 top
C39 "100n" 0603 38.35,58.2 r0 top
C40 "100n" 0603 38.3,64.797 r0 top
C41 "100n" 0603 108.55,167.75 r90 top
C42 "100n" 0603 54.8,160.397 r0 top
C43 "100n" 0603 52.503,168.45 r90 top
C44 "100n" 0603 90.7,115.6 r180 top
C45 "100n" 0603 90.7,91.603 r180 top
C46 "100n" 0603 90.65,103.45 r180 top
C47 "100n" 0603 102.7,113.55 r90 top
C48 "100n" 0603 61.2,28.75 r90 top
C49 "100n" 0603 68.6,29.7 r270 top
C50 "100n" 0603 70.253,53.3 r90 top
D1 "B260A-13-F" DO-214Pol 122.55,61.45 r180 top
D2 "B260A-13-F" DO-214Pol 123.15,46.55 r180 top
D3 "B260A-13-F" DO-214Pol 127.3,39.1 r180 top
D4 "Diode Shottky" SOD523 91.297,167.75 r0 top
D5 "Diode Shottky" SOD523 96.647,162.403 r90 top
D6 "Diode Shottky" SOD523 62.453,168.45 r0 top
D7 "Diode Shottky" SOD523 67.9,162.9 r90 top
D8 "Diode Shottky" SOD523 38.653,168.25 r0 top
D9 "Diode Shottky" SOD523 43.8,162.803 r90 top
D10 "5V1" SOT23 111.65,93.55 r90 top
D11 "5V1" SOT23 100.45,88.035 r90 top
D12 "5V1" SOT23 117.35,118.6 r90 top
D13 "5V1" SOT23 100.55,101.6 r90 top
D14 "5V1" SOT23 100.5,92.35 r90 top
D15 "5V1" SOT23 128.2,118.3 r90 top
D16 "5V1" SOT23 111.65,98.6 r90 top
D17 "5V1" SOT23 111.65,89.1 r90 top
D18 "5V1" SOT23 100.5,106.25 r90 top
D19 "5V1" SOT23 100.5,96.5 r90 top
D20 "5V1" SOT23 36.55,51.2 r180 top
D21 "5V1" SOT23 36.55,58.5 r180 top
D22 "5V1" SOT23 36.5,65.05 r180 top
D23 "3V9" SOD80C 92,148.45 r180 top
D24 "3V9" SOD80C 94.4,148.45 r0 top
D25 "3V9" SOD80C 66.95,148.45 r180 top
D26 "3V9" SOD80C 69.4,148.45 r0 top
D27 "3V9" SOD80C 43.1,148.45 r180 top
D28 "3V9" SOD80C 45.45,148.45 r0 top
Dip1 "DS1040-05RT" "DipSwitch 5" 24.937,43.948 r270 top
F1 "Resettable FUSE" 1812 119,57.5 r0 top
F2 "Resettable FUSE" 1812 118.95,53.45 r0 top
F3 "Resettable FUSE" 1210 126.05,70.25 r90 top
F4 "Resettable FUSE" 1210 126.05,67.25 r90 top
J1 "IDC-10" IDC-10MS 78.31,46.36 r270 top
L1 "22uH" CDRH127 112.75,41.2 r180 top
LED1 "KP-1608SGC" 0603 117,162.6 r270 bottom
LED2 "KP-1608SGC" 0603 117,157.1 r270 bottom
LED3 "KP-1608SGC" 0603 118.871,162.6 r90 bottom
LED6 "KP-1608SGC" 0603 118.871,157.1 r90 bottom
P1 "MCD 1.5/6-G1-3.81" "mcd 1,5/6-G1-3.81" 119.95,93.86 r270 top
P2 "MCD 1.5/6-G1-3.81" "mcd 1,5/6-G1-3.81" 38.75,101.58 r90 top
P3 "X2X" PhClass5 130.061,69.469 r270 top
PL1 "plug" "PLS 4" 96.54,133.55 r90 top
PL2 "plug" "PLS 4" 96.54,144.35 r90 top
PL3 "plug" "PLS 4" 72.24,144.45 r90 top
PL4 "plug" "PLS 4" 72.24,133.5 r90 top
PL5 "plug" "PLS 4" 48.04,144.45 r90 top
PL6 "plug" "PLS 4" 47.99,133.5 r90 top
PL7 "plug" "PLS 5" 113.084,133.45 r270 top
PL8 "plug" "PLS 5" 123.33,144.35 r90 top
PL9 "Plug 3Pin" "3.81 Plug" 26.45,58.63 r90 top
R1 "100k" 0603 128.95,30.303 r180 top
R2 "10k" 0603 119.153,27.8 r90 top
R3 "2k32" 0603 122.453,27.8 r90 top
R4 "10k" 0603 127.4,28.475 r0 top
R7 "560R" 0603 115.2,164.2 r270 top
R8 "560R" 0603 115.197,155.65 r270 top
R9 "1k" 0603 119.7,169.2 r270 top
R10 "1k" 0603 115.647,149.1 r270 top
R11 "560R" 0603 124.2,158.45 r90 top
R12 "560R" 0603 122.371,160.85 r270 top
R13 "1k" 0603 125.2,167.35 r90 top
R14 "10k" 0603 109.25,81.597 r0 top
R15 "10k" 0603 111.35,87 r90 top
R16 "10k" 0603 99.95,78 r0 top
R17 "10k" 0603 110.003,78.45 r90 top
R18 "10k" 0603 104.497,72.8 r270 top
R19 "47k" 0603 102.2,68.647 r0 top
R20 "10k" 0603 86.95,163.55 r180 top
R21 "1k" 0603 109.097,163.197 r0 top
R22 "10k" 0603 86.947,166.803 r180 top
R23 "1k" 0603 105.25,167.8 r90 top
R24 "100" 1206 94.25,154.05 r90 top
R25 "82k" 0603 99.75,166.6 r180 top
R26 "10k" 0603 98.2,166.6 r180 top
R27 "10k" 0603 58.25,164.2 r180 top
R28 "1k" 0603 79.15,163.7 r0 top
R29 "10k" 0603 58.25,167.503 r180 top
R30 "100" 1206 69.95,154.35 r90 top
R31 "1k" 0603 73.25,168.6 r90 top
R32 "82k" 0603 69.45,167.403 r180 top
R33 "10k" 0603 67.9,167.353 r180 top
R34 "10k" 0603 34.35,163.95 r180 top
R35 "1k" 0603 54.8,163.7 r0 top
R36 "10k" 0603 34.35,167.153 r180 top
R37 "100" 1206 45.85,154.1 r90 top
R38 "1k" 0603 49.203,168.45 r90 top
R39 "82k" 0603 45.45,167.2 r180 top
R40 "10k" 0603 43.85,167.203 r180 top
R41 "10k" 0603 72.547,75.4 r270 top
R42 "10k" 0603 72.547,94.65 r270 top
R43 "39k" 1206 55.05,75.35 r270 top
R44 "39k" 1206 44.75,75.35 r270 top
R45 "39k" 1206 52.95,75.35 r90 top
R46 "2k" 1206 60.8,72.6 r0 top
R47 "39k" 1206 54.95,94.58 r270 top
R48 "39k" 1206 44.75,94.58 r270 top
R49 "39k" 1206 52.85,94.58 r90 top
R50 "2k" 1206 60.75,91.84 r0 top
R51 "10k" 0603 72.547,81.85 r270 top
R52 "10k" 0603 72.547,100.9 r270 top
R53 "39k" 1206 54.95,81.96 r270 top
R54 "39k" 1206 44.75,81.96 r270 top
R55 "39k" 1206 52.85,81.96 r90 top
R56 "2k" 1206 60.9,79.08 r0 top
R57 "39k" 1206 54.85,100.74 r270 top
R58 "39k" 1206 44.75,100.74 r270 top
R59 "39k" 1206 52.85,100.74 r90 top
R60 "2k" 1206 60.75,98.12 r0 top
R61 "10k" 0603 72.547,88.3 r270 top
R62 "10k" 0603 72.7,108 r270 top
R63 "39k" 1206 55.05,88.47 r270 top
R64 "39k" 1206 44.85,88.47 r270 top
R65 "39k" 1206 52.95,88.47 r90 top
R66 "2k" 1206 60.75,85.51 r0 top
R67 "39k" 1206 52.55,107.2 r270 top
R68 "39k" 1206 42.55,107.2 r270 top
R69 "39k" 1206 50.55,107.2 r90 top
R70 "2k" 1206 60.75,105.25 r0 top
R71 "47k" 0603 116.653,95.95 r90 top
R72 "47k" 0603 105.503,90.45 r90 top
R73 "47k" 0603 122.45,119.2 r90 top
R74 "47k" 0603 105.603,104.05 r90 top
R75 "10k" 0603 113.4,94.2 r0 top
R76 "10k" 0603 105.503,89 r90 top
R77 "10k" 0603 122.45,120.75 r90 top
R78 "10k" 0603 105.6,102.5 r90 top
R79 "47k" 0603 105.5,94.75 r90 top
R80 "47k" 0603 133.303,119.2 r90 top
R81 "47k" 0603 116.653,101 r90 top
R82 "10k" 0603 105.5,93.25 r90 top
R83 "10k" 0603 133.3,120.666 r90 top
R84 "10k" 0603 116.65,99.5 r90 top
R85 "47k" 0603 116.65,90.8 r90 top
R86 "47k" 0603 105.5,108.6 r90 top
R87 "47k" 0603 105.553,98.9 r90 top
R88 "10k" 0603 116.7,89.1 r90 top
R89 "10k" 0603 105.5,107.1 r90 top
R90 "10k" 0603 105.55,97.4 r90 top
R91 "10k" 0603 68.45,50.047 r0 top
R92 "47k" 0603 32.65,49.697 r0 top
R93 "10k" 0603 31.1,49.697 r0 top
R94 "47k" 0603 32.5,56.947 r0 top
R95 "10k" 0603 30.95,56.95 r0 top
R96 "47k" 0603 32.5,63.597 r0 top
R97 "10k" 0603 30.95,63.597 r0 top
R98 "10k" 0603 35.084,33.838 r270 top
R99 "10k" 0603 35.084,36.338 r270 top
R100 "10k" 0603 35.084,38.888 r270 top
R101 "10k" 0603 35.084,41.238 r270 top
R102 "10k" 0603 35.084,43.838 r270 top
R103 "10k" 0603 93.8,79 r0 top
SD1 "DM3AT-SF-PEJM5" DM3AT-SF-PEJM5 119.05,81.85 r90 top
T1 "BSS138BK.215" SOT23 118,169 r180 top
T2 "BSS138BK.215" SOT23 115.5,151.15 r0 top
T3 "BSS138BK.215" SOT23 125.45,165.35 r180 top
T4 "Current Trans" Talema 100.64,151.507 r180 top
T5 "Current Trans" Talema 76.42,151.507 r180 top
T6 "Current Trans" Talema 52.12,151.507 r180 top
TVS1 "TVS" DO-214AC 119.7,49.75 r0 top
TVS2 "TVS Diode" DO-214AC 120.25,66.8 r90 top
TVS3 "TVS Diode" DO-214AC 113.1,66.2 r0 top
TVS4 "TVS Diode" DO-214AC 113.1,71.75 r0 top
TVS5 "SMAJ5.0CA" DO-214AC 94.95,151.4 r180 top
TVS6 "SMAJ5.0CA" DO-214AC 70.65,151.55 r180 top
TVS7 "SMAJ5.0CA" DO-214AC 46.65,151.5 r180 top
U1 "TPS5430DDAR" "SOIC-8 + Thermal Pad" 110.43,35.081 r0 top
U2 "LD1117S50CTR" SOT223 57.45,125.723 r270 top
U3 "LD1117S33CTR" SOT223 98.75,41.327 r90 top
U4 "LD1117S50CTR" SOT223 98.8,25.977 r90 top
U5 "Gate" "SOT23 - 5 lead" 110.95,82.55 r270 top
U6 "Gate" "SOT23 - 5 lead" 112.9,86.55 r270 top
U7 "Gate" "SOT23 - 5 lead" 111.6,77.95 r270 top
U8 "SN65HVD3082EDR" "SOIC 8" 104.55,71.04 r270 top
U9 "ADS" "SOT23 - 6" 90.953,126.792 r180 top
U10 "OPAMP 2Ch" "SOIC 8" 94.747,162.46 r90 top
U11 "OPAMP 2Ch" "SOIC 8" 101.697,166.27 r270 top
U12 "ADS" "SOT23 - 6" 94.95,126.792 r180 top
U13 "OPAMP 2Ch" "SOIC 8" 65.85,163.06 r90 top
U14 "OPAMP 2Ch" "SOIC 8" 71.45,166.87 r270 top
U15 "ADS" "SOT23 - 6" 74.965,126.792 r180 top
U16 "ADS" "SOT23 - 6" 78.962,126.792 r180 top
U17 "OPAMP 2Ch" "SOIC 8" 41.85,162.88 r90 top
U18 "OPAMP 2Ch" "SOIC 8" 47.4,166.69 r270 top
U19 "ADS" "SOT23 - 6" 82.959,126.792 r180 top
U20 "ADS" "SOT23 - 6" 86.956,126.792 r180 top
U21 "CD4516" TSSOP-16 87.9,109.95 r270 top
U22 "74HC74D" "SOIC 14 lead" 106.3,115.19 r90 top
U23 "CD4516" TSSOP-16 87.9,98.2 r270 top
U24 "CD4516" TSSOP-16 87.9,86.45 r270 top
U25 "ATmega128A-AU" 64A_N 62.5,40.15 r180 top
U26 "Gate" "SOT23 - 5 lead" 95.65,79.9 r270 top
U*1 "LTV-357T" SOP-4 63.3,78.39 r270 top
U*2 "LTV-357T" SOP-4 63.2,97.636 r270 top
U*3 "LTV-357T" SOP-4 63.3,84.872 r270 top
U*4 "LTV-357T" SOP-4 63.2,103.918 r270 top
U*5 "LTV-357T" SOP-4 63.3,91.304 r270 top
U*6 "LTV-357T" SOP-4 63.1,111 r270 top
XTL1 "16.0 MHz" ABM10 62.8,51.15 r0 top

## Footprints (in the part's own frame and the unit in brackets; to place one, negate y for a bottom-side part, rotate by r counter-clockwise, add the part's x,y. Pads: shape width x height; smd on the part's side, far side on the other; paste and mask are expansions set on the pad)
"3.81 Plug" [mm] "Plug"
  round 2 hole 1: 1(0,0) 2(3.81,0) 3(7.62,0)
  silkscreen extent -2.44,-1.2 9.98,7.99, body extent -2.54,-1.3 10.08,8.09
64A_N [mm] "Thin QFP, 64-Leads, Body 14x14mm, Pitch 0.8mm, IPC Medium Density"
  oval 1.75x0.55 smd: 1(-7.65,6) 2(-7.65,5.2) 3(-7.65,4.4) 4(-7.65,3.6) 5(-7.65,2.8) 6(-7.65,2) 7(-7.65,1.2) 8(-7.65,0.4) 9(-7.65,-0.4) 10(-7.65,-1.2) 11(-7.65,-2) 12(-7.65,-2.8) 13(-7.65,-3.6) 14(-7.65,-4.4) 15(-7.65,-5.2) 16(-7.65,-6) 33(7.65,-6) 34(7.65,-5.2) 35(7.65,-4.4) 36(7.65,-3.6) 37(7.65,-2.8) 38(7.65,-2) 39(7.65,-1.2) 40(7.65,-0.4) 41(7.65,0.4) 42(7.65,1.2) 43(7.65,2) 44(7.65,2.8) 45(7.65,3.6) 46(7.65,4.4) 47(7.65,5.2) 48(7.65,6)
  oval 0.55x1.75 smd: 17(-6,-7.65) 18(-5.2,-7.65) 19(-4.4,-7.65) 20(-3.6,-7.65) 21(-2.8,-7.65) 22(-2,-7.65) 23(-1.2,-7.65) 24(-0.4,-7.65) 25(0.4,-7.65) 26(1.2,-7.65) 27(2,-7.65) 28(2.8,-7.65) 29(3.6,-7.65) 30(4.4,-7.65) 31(5.2,-7.65) 32(6,-7.65) 49(6,7.65) 50(5.2,7.65) 51(4.4,7.65) 52(3.6,7.65) 53(2.8,7.65) 54(2,7.65) 55(1.2,7.65) 56(0.4,7.65) 57(-0.4,7.65) 58(-1.2,7.65) 59(-2,7.65) 60(-2.8,7.65) 61(-3.6,7.65) 62(-4.4,7.65) 63(-5.2,7.65) 64(-6,7.65)
  silkscreen extent -7.78,-6.35 6.35,6.95, body extent -7,-7 7,7, height 1.2
0603 [mm]
  rect 0.9x0.8 smd mask+0.102: 1(0,0) 2(0,1.803)
  silkscreen extent -0.66,-0.58 0.66,2.41, body extent -0.55,-0.5 0.55,2.3, height 1
0805 [mm]
  rect 1.3x1 smd: 1(0,0) 2(0,2.35)
  silkscreen extent -0.89,-0.74 0.91,3.1, body extent -0.75,-0.6 0.75,2.95, height 1
1206 [mm]
  rect 1.7x1.25 smd: 1(0,0) 2(0,3)
  silkscreen extent -1.09,-0.86 1.09,3.86, body extent -0.95,-0.73 0.95,3.73, height 2
1210 [mm]
  rect 2.1x1.1 smd: 1(0,0) 2(0,3.3)
  silkscreen extent -1.32,-0.84 1.32,4.17, body extent -1.15,-0.65 1.15,3.95, height 2
1812 [mm]
  rrect50% 2x3.2 smd: 1(0,0) 2(5.45,0)
  silkscreen extent 0.51,-1.27 4.83,1.4, body extent 0.38,-1.4 4.95,1.52, height 2
ABM10 [mm]
  rect 0.9x0.8 smd: 1(0,0) 2(0,1.25) 2(1.65,0) 3(1.65,1.25)
  silkscreen extent -0.94,-0.79 2.36,1.9, body extent -1.07,-0.91 2.49,2.03, height 1
CDRH127 [mm]
  rect 5.4x2.9 smd: 1(0,0) 2(0,10)
  silkscreen extent -6.02,-1.08 6.15,10.92, body extent -6.29,-1.43 6.42,11.27, height 7
"DipSwitch 5" [mil]
  round 60 hole 27.56: 1(0,0) 2(100,0) 3(200,0) 4(300,0) 5(400,0) 12(400,300) 13(300,300) 14(200,300) 15(100,300) 16(0,300)
  silkscreen extent -75,-55 460,355, body extent -85,-65 470,365
DM3AT-SF-PEJM5 [mm]
  rect 0.7x1.2 smd: 1(3.2,0) 2(2.1,0) 3(1,0) 4(-0.1,0) 5(-1.2,0) 6(-2.3,0) 7(-3.4,0) 8(-4.5,0) SWB(-5.45,0)
  rect 1x1.2 smd: P1(-6.4,-4.3) P4(4.75,0)
  rect 1x2.8 smd: P2(-6.4,-14.65)
  rect 1.3x1.9 smd: P3(7.1,-15.1)
  rect 1x0.8 smd: SWA(-6.4,-10.5)
  silkscreen extent -6.5,-21.3 7.35,1.75
DO-214AC [mm]
  rect 1.8x2.1 smd: 1(0,0) 2(4.4,0)
  silkscreen extent -1.19,-1.3 5.56,1.3, body extent -1,-1.15 5.4,1.15
DO-214Pol [mm]
  rect 1.6x1.7 smd: 1(0,0) 2(3.5,0)
  silkscreen extent -1.5,-1.35 4.55,1.42, body extent -0.9,-0.95 4.4,0.95, height 2
IDC-10MS [mm]
  rect 1.65x1.65 hole 1: 1(0,0)
  round 1.65 hole 1: 2(0,2.54) 3(2.54,0) 4(2.54,2.54) 5(5.08,0) 6(5.08,2.54) 7(7.62,0) 8(7.62,2.54) 9(10.16,0) 10(10.16,2.54)
  silkscreen extent -4.95,-3.18 15.11,5.72, body extent -5.08,-3.3 15.24,5.84
"mcd 1,5/6-G1-3.81" [mm]
  round 1.6 hole 1.2: 1(-19.025,12.7) 2(-19.05,0) 3(-15.24,12.7) 4(-15.24,0) 5(-11.43,12.7) 6(-11.43,0) 7(-7.62,12.7) 8(-7.62,0) 9(-3.81,12.7) 10(-3.81,0) 11(0,12.7) 12(0,0)
  silkscreen extent -21.59,-1.27 2.54,20.32, body extent -21.72,-1.4 2.67,20.45, height 20
PhClass5 [mm]
  round 2.5 hole 1.75: 1(0,0) 2(5.08,0) 3(10.16,0) 4(15.24,0) 5(20.32,0)
  silkscreen extent -3.6,-2 23.56,10, body extent -3.73,-2.13 23.69,10.13, height 8
"PLS 4" [mil]
  oct 66x66 hole 37.4: 1(0,0) 2(0,100) 3(0,200) 4(0,300)
  silkscreen extent -50,-50 50,347, body extent -50,-50 50,350
"PLS 5" [mil]
  oct 66x66 hole 37.4: 1(0,0) 2(0,100) 3(0,200) 4(0,300) 5(0,400)
  silkscreen extent -50,-50 50,447, body extent -50,-50 50,450
SOD80C [mm]
  rect 1x1.7 smd: 1(3.3,0) 2(0,0)
  silkscreen extent -1.02,-1.07 4.01,1.07
SOD523 [mm]
  rect 0.5x0.6 smd: 1(0,0) 2(1.397,0)
  silkscreen extent -0.89,-0.48 1.85,0.53, body extent -0.35,-0.4 1.75,0.4, height 3
"SOIC 8" [mm]
  rect 0.6x1.5 smd: 1(0,0) 2(1.27,0) 3(2.54,0) 4(3.81,0) 5(3.81,5.4) 6(2.54,5.4) 7(1.27,5.4) 8(0,5.4)
  silkscreen extent -0.64,1.14 4.44,4.19, body extent -0.76,1.02 4.57,4.32, height 1
"SOIC 14 lead" [mm]
  rect 0.6x1.5 smd: 1(0,0) 2(1.27,0) 3(2.54,0) 4(3.81,0) 5(5.08,0) 6(6.35,0) 7(7.62,0) 8(7.62,5.4) 9(6.35,5.4) 10(5.08,5.4) 11(3.81,5.4) 12(2.54,5.4) 13(1.27,5.4) 14(0,5.4)
  silkscreen extent -0.64,1.14 8.25,4.19
"SOIC-8 + Thermal Pad" [mm]
  rrect10% 1.55x0.6 smd mask+0: 1(11.27,1.524) 2(11.27,0.254) 3(11.27,-1.016) 4(11.27,-2.286) 5(16.67,-2.286) 6(16.67,-1.016) 7(16.67,0.254) 8(16.67,1.524)
  rect 2.95x4.9 smd paste-3 mask+0: TP(13.97,-0.381)
  silkscreen extent 11.2,-2.95 15.47,2.39, body extent 10.5,-2.83 17.44,2.07
SOP-4 [mm]
  rect 0.8x1 smd: 1(3,1.5) 2(5.54,1.5) 3(5.54,8) 4(3,8)
  silkscreen extent 2.25,2 6.25,7.5, body extent 2.15,1.9 6.35,7.6
SOT23 [mm]
  rect 1x1.4 smd: 1(0,0) 2(2.2,0) 3(1.1,2.6)
  silkscreen extent -0.89,-0.89 3.05,3.43, body extent -1.02,-1.02 3.17,3.56, height 1
"SOT23 - 5 lead" [mm]
  rrect50% 0.5x1.05 smd: 1(0,0) 2(0.95,0) 3(1.9,0) 4(1.9,2.7) 5(0,2.7)
  silkscreen extent -0.51,0.63 2.41,2.16, body extent -0.61,0.54 2.51,2.26, height 1
"SOT23 - 6" [mm]
  rrect50% 0.5x1.05 smd: 1(0,0) 2(0.95,0) 3(1.9,0) 4(1.9,2.7) 5(0.965,2.692) 6(0,2.7)
  silkscreen extent -1.2,0.4 2.41,2.16, body extent -0.35,-0.63 2.25,3.33, height 1
SOT223 [mm]
  rrect50% 1.5x2.5 smd mask+0.1: 1(-0.127,0) 2(2.173,0) 3(4.473,0)
  rrect50% 4x4 smd: 2(2.173,5)
  silkscreen extent -1.4,0.89 5.59,4.45, body extent -1.52,0.76 5.71,4.57, height 1
Talema [mm]
  round 2.5 hole 1: 1(15.24,0) 2(0,0) 3(7.62,-7.62)
  silkscreen extent -4.38,-9.99 19.62,2.01, body extent -4.48,-10.09 19.72,2.11
TSSOP-16 [mm] "Shrink Small Outline, Plastic, Thin; 14 Leads; Body Width 4.4 mm; Pitch 0.65 mm"
  rect 0.3x1.65 smd: 1(-1.95,-2.775) 2(-1.3,-2.775) 3(-0.65,-2.775) 4(0,-2.775) 5(0.65,-2.775) 6(1.3,-2.775) 7(1.95,-2.775) 8(2.6,-2.775) 9(2.61,2.775) 10(1.96,2.775) 11(1.31,2.775) 12(0.66,2.775) 13(0.01,2.775) 14(-0.64,2.775) 15(-1.29,2.775) 16(-1.95,2.775)
  silkscreen extent -2.77,-2.9 3.18,1.55, body extent -2.55,-1.55 3.18,1.55, height 1.1

## Part data
C1: library part "0603 CAP", "CC0603JRX7R9BB103"
C2 C3 C4: library part Capacitor, "CC0805MKX5R6BB226", Power/Voltage=50В, Tolerance=10%, Name=0805, Type="Конденсатор ЧИП"
C5 C7 C9 C11 C13 C14 C15 C16 C17 C18 C19 C20 C21 C22 C23 C24 C25 C26 C27 C28 C29 C30 C31 C32 C33 C34 C35 C38 C39 C40 C41 C42 C43 C44 C45 C46 C47 C48 C49 C50: library part "0603 CAP", "CC0603KRX7R9BB104"
C6: library part "1206 Cap", "GRM32ER71H106KA12L"
C8 C10 C12: library part "0603 CAP", "GRM188R61C106MA73D"
C36 C37: library part "0603 CAP", "CC0603JRNPO9BN180"
D4 D5 D6 D7 D8 D9: "RB751S40T1G"
D10 D11 D12 D13 D14 D15 D16 D17 D18 D19 D20 D21 D22: library part "D Zener", "BZX84C5V1LT1G"
D23 D24 D25 D26 D27 D28: library part "D Zener", "BZV55-C3V9,115"
Dip1: library part DipSwitch5, "DPL-05-V"
F1 F2: library part "Fuse PTS", "MF-MSMF030-2"
F3 F4: library part "Fuse PTS", "MF-USMF005-2"
J1: library part IDC-10MS, "DS1013-10SSIB1-B-0"
L1: library part "Inductor CDRH127", "CDRH127/LDNP-220MC"
LED1 LED2 LED3 LED6: library part "0603 LED", LatestRevisionDate=08-Jul-2005, LatestRevisionNote="Mech Layer 1 removed.", PackageDescription="LED; 2 Leads", PackageReference=LED-0, Published=8-Jun-2000, Publisher="Altium Limited"
P1 P2: library part "Header 6X2", "Header, 6-Pin, Dual row", LatestRevisionDate=17-Jul-2002, LatestRevisionNote="Re-released for DXP Platform.", Publisher="Altium Limited"
P3: library part "EMSTBA 2.5/5-G-5.08", "EMSTBA 2.5/5-G-5.08"
PL1 PL2 PL3 PL4 PL5 PL6: library part PLS-4R, "PLS-4R (DS1022-1x4R)"
PL7 PL8: library part PLS-5R, "PLS-5R (DS1022-1x5R)"
PL9: "15EDGRC-3.81-03P-14-00AH"
R1: library part "0603 RES", "RC0603FR-10100KL"
R2 R4 R14 R15 R16 R17 R18 R20 R22 R26 R27 R29 R33 R34 R36 R40 R41 R42 R51 R52 R61 R62 R75 R76 R77 R78 R82 R83 R84 R88 R89 R90 R91 R93 R95 R97 R98 R99 R100 R101 R102 R103: library part "0603 RES", "RT0603FRE0710KL"
R3: library part "0603 RES", "RC0603FR-072K32L"
R7 R8 R11 R12: library part "0603 RES", "RC0603JR-07560RL"
R9 R10 R13 R21 R23 R28 R31 R35 R38: library part "0603 RES", "RC0603FR-071KL"
R19 R71 R72 R73 R74 R79 R80 R81 R85 R86 R87 R92 R94 R96: library part "0603 RES", "RC0603JR-0747K"
R24 R30 R37: library part "SMD Resistor", "RT1206BRD07100RL"
R25 R32 R39: library part "0603 RES", "ERJ3EKF8202V"
R43 R44 R45 R47 R48 R49 R53 R54 R55 R57 R58 R59 R63 R64 R65 R67 R68 R69: library part "1206 R", "RC1206FR-0739KL"
R46 R50 R56 R60 R66 R70: library part "1206 R", "RC1206FR-072KL"
T1 T2 T3: library part BSS138
T4 T5 T6: "AC-1005"
TVS1: "SMAJ30CA"
TVS2 TVS3 TVS4: library part TVS, "SMAJ6.0CA"
U2 U3 U4: library part ldo
U5 U6 U7 U26: "SN74LVC1G125DBVR"
U8: library part MAX485
U9 U12 U15 U16 U19 U20: "ADC121S021CIMF"
U10 U11 U13 U14 U17 U18: "TS272IDT"
U22: "74HC74D,653"
U25: "8-bit AVR Microcontroller, 2.7-5.5V, 16MHz, 128KB Flash, 4KB EEPROM, 4KB SRAM, 64-pin TQFP, Industrial Grade (-40°C to 85°C)", Code_JEDEC=MS-026-AEB, ComponentLink1Description="Manufacturer URL", ComponentLink1URL=http://www.atmel.com/, ComponentLink2Description="ATmega128A Datasheet", ComponentLink2URL=http://www.atmel.com/dyn/resources/prod_documents/doc8151.pdf, ComponentLink3Description="ATmega128A Summary", ComponentLink3URL=http://www.atmel.com/dyn/resources/prod_documents/8151S.pdf, DatasheetVersion="revH, Feb-2011", PackageDescription="64-Pin Plastic Thin Profile Quad Flat Pack, 14 x 14 x 1.0 mm Body, 0.8 mm Pitch (TQFP)", PackageReference=64A, PackageVersion="revC, Oct-2010"
XTL1: library part KX-7, "12.88605"

## Free pads (board coordinates)
  round 0 hole 3.3 unplated paste+0 mask+0: 0(45.111,113.251)
  round 5.5 hole 3.3: 0(115.111,113.251)

## Via types
v1: diameter 1, hole 0.5, Top to Bottom, 262 vias

## Nets (pads, with @x,y where several pads share a name; then routed paths per layer and width w, separated by ;. In a path a pad name is that pad's centre, name@x,y a point inside that pad or via, vN(x,y) a via of type N, cw(c..) or ccw(c..) an arc to the next point about the centre after c; other vN are vias at no path point)
+3V3: C9.1 C10.1 C13.2 R16.2 SD1.4 U3.2 U5.5 U6.5 U7.5 U26.5 | length 86.2
  Top w0.3: U26.5@98.45,79.8 U26.5@98.35,79.9 v1(104.35,79.9)
  Top w0.5: U5.5@113.65,82.55 115.05,82.55 v1(115.7,81.9) 116.753,81.9 C13.2@117.15,81.503 117.397,81.75 SD1.4@119.05,81.75 ; v1(114.15,78.9) 114.3,78.75 U7.5@114.3,77.95 ; U6.5@115.6,86.55 v1(117,86.55)
  Top w1: U3.2@93.75,43.5 U3.2@98.75,43.5 102.6,43.5 C10.1@102.9,43.2 v1(104.3,43.2)
  High speed w0.3: v1(104.35,79.9) 105.75,78.5 113.5,78.5 113.75,78.25
  High speed w0.5: 113.75,81.9 v1(115.7,81.9)
  High speed w1: v1(104.3,43.2) 104.35,43.2 112.55,51.4 112.55,76.3 113.75,77.5 113.75,78.25 114.15,78.65 v1(114.15,78.9) 114.15,81.5 113.75,81.9 117,85.15 v1(117,86.55)
+5V: Dip1.1 Dip1.2 Dip1.3 Dip1.4 Dip1.5 | length 10.2
  Top w0.4: Dip1.5@24.937,33.788 Dip1.4@24.937,36.328 Dip1.3@24.937,38.868 Dip1.2@24.937,41.408 Dip1.1@24.937,43.948
"+5V Noise": C11.1 C12.1 C14.1 C44.2 C45.2 C46.2 C47.2 C48.2 C49.2 C50.2 J1.2 LED1.1 LED2.1 LED3.1 LED6.1 PL7.4 PL8.2 R14.2 R15.2 R17.2 R18.2 R41.2 R42.2 R51.2 R52.2 R61.2 R62.2 R91.2 R103.2 SD1.SWA U4.2 U8.8 U21.16 U22.1 U22.4 U22.14 U23.16 U24.16 U25.21 U25.52 U25.64 | length 85.3
  Top w0.3: U25.21@65.3,47.8 65.3,48.75 66.4,49.85 66.8,49.85 67.3,50.35 67.3,50.7 R91.2@68.45,51.85 C50.2@68.45,53.3 ; C50.2@68.45,53.3 68.55,53.4 v1(68.55,54.85) ; U24.16@90.675,88.4 90.7,88.425 C45.2@90.7,89.8 90.9,90 v1@92.1,90 ; U23.16@90.675,100.15 90.675,101.622 C46.2@90.65,101.647 v1@91.803,101.647 ; U21.16@90.675,111.9 90.95,112.175 90.95,113.727 90.8,113.997 v1@92.197,113.997 ; U4.2@93.8,28.15 U4.2@98.8,28.15 99.197,27.753 C12.1@103.15,27.753 v1@104.547,27.753 ; v1(107.75,83.4) R14.2@109.25,83.4 ; R17.2@108.2,78.45 v1@108.2,79.85 ; v1(109.5,85.8) 109.5,86.953 R15.2@109.547,87 ; v1@129.55,74.25 SD1.SWA@129.55,75.45
  Top w0.4: U25.52@58.9,32.5 58.9,30.65 59.4,30.15 v1(59.4,27.15) ; U25.64@68.5,32.05 U25.64@68.5,32.5 70.403,30.597 C49.2@70.403,29.7 ; v1(70.45,28.3) C49.2@70.45,30 ; v1(74.3,102.3) 74.35,102.25 R52.2@74.35,100.9 ; R41.2@74.35,75.4 v1(74.35,76.95) ; R51.2@74.35,81.85 74.4,81.9 v1(74.4,83.25) ; R42.2@74.35,94.65 74.4,94.7 v1(74.4,96.15) ; R52.2@74.35,101.1 R52.2@74.55,100.9 ; v1(74.45,89.7) 74.503,89.647 R61.2@74.503,88.3 ; v1(74.5,109.45) 74.5,108.003 R62.2@74.503,108 ; v1@92.353,80.803 R103.2@93.8,80.803 ; v1(100.75,111.65) 100.75,113.403 C47.2@100.897,113.55 100.897,115.187 U22.14@100.9,115.19 105.01,115.19 ; R18.2@106.3,72.8 v1@106.3,74.1 ; U22.1@106.3,115.19 105.01,115.19 ; U22.4@106.3,119 105.05,119 104.45,118.4 104.45,115.75 105.01,115.19 ; v1@109.853,74.053 C14.1@109.853,72.75 109.853,71.137 U8.8@109.95,71.04
  HighSpeed w0.4: v1(104.6,28) v1(105.85,28)
  Bottom w0.4: LED2.1@117,157.1 117.9,157.1 ; LED1.1@117,162.6 117.936,162.6 ; LED6.1@118.871,157.1 117.9,157.1 ; LED3.1@118.871,162.6 117.936,162.6 ; 117.9,157.1 117.936,157.136 v1(117.936,159.6) 117.936,162.6
  other v1: 109.853,73.9 106.35,74.1 129.5,74.2 108.3,79.95 92.35,80.75 92.15,90 91.95,101.6 92.3,114.1
"+5V Proc": C7.1 C8.1 PL1.4 PL2.4 PL3.4 PL4.4 PL5.4 PL6.4 U2.2 U9.1 U10.8 U11.8 U12.1 U13.8 U14.8 U15.1 U16.1 U17.8 U18.8 U19.1 U20.1 | length 267.3
  Top w0.3: U15.1@74.965,126.792 v1@75.892,126.792 ; U16.1@78.962,126.792 v1@79.992,126.792 ; U19.1@82.959,126.792 v1(83.842,126.792) ; U20.1@86.956,126.792 v1(87.8,126.792) ; U9.1@90.953,126.792 v1@91.692,126.792 ; U12.1@94.95,126.792 v1@95.992,126.792
  Top w0.4: U11.8@107.097,166.27 110.58,166.27 v1(110.6,166.25)
  Top w0.45: U17.8@36.45,162.88 38.52,162.88 v1(38.7,162.7) ; U18.8@52.8,166.69 52.81,166.7 55,166.7 v1(55.65,167.35) ; U13.8@60.45,163.06 v1@62.24,163.06 ; U14.8@76.85,166.87 78.37,166.87 v1(78.7,167.2) ; v1(89.3,161.05) 89.347,161.097 U10.8@89.347,162.46
  Top w1: v1(51.95,123.55) U2.2@57.45,123.55 U2.2@62.45,123.55
  High speed w1: v1(38.7,162.7) 40.42,160.98 40.42,150.92 ; PL5.4@40.42,144.45 40.42,150.92 ; v1(55.65,167.35) 55.65,166.15 40.42,150.92 ; v1(62.28,163.02) 64.62,160.68 64.62,148.62 ; PL3.4@64.62,144.45 64.62,148.62 ; v1(78.7,167.2) 78.7,162.7 64.62,148.62 ; PL2.4@88.92,144.35 88.92,148.37 ; v1(89.3,161.05) 88.92,160.67 88.92,148.37 ; v1(110.6,166.25) 110.2,166.25 101.75,157.8 98.35,157.8 88.92,148.37
  Bottom w0.5: 53.6,123.55 65.75,123.55 67.35,125.15 67.4,125.15 69.05,126.8 v1(75.9,126.8) ; v1(75.9,126.8) v1(79.9,126.8) 79.907,126.792 v1(87.8,126.792) 95.992,126.792 v1(96,126.8)
  Bottom w1: PL6.4@40.37,133.5 40.37,130.53 47.35,123.55 v1(50.8,123.55) v1(51.95,123.55) 53.6,123.55 60.45,130.4 64.15,130.4 ; PL4.4@64.62,133.5 64.62,130.87 64.15,130.4 ; PL1.4@88.92,133.55 85.77,130.4 64.15,130.4
  other v1: 91.9,126.85
+6.5V: C2.2 C3.2 C4.2 L1.2 R2.2 U2.3 U3.3 U4.3 | length 235.6
  Top w0.3: C3.2@110.65,27.8 C2.2@112.8,27.8 ; L1.2@112.8,30.35 C2.2@112.8,27.8 ; R2.2@117.35,27.8 C4.2@114.85,27.8 C2.2@112.8,27.8
  Top w1: v1(53.55,121.25) U2.3@57.45,121.25 ; U3.3@98.75,45.8 104.9,45.8 107.2,43.5 ; U4.3@98.8,30.45 107.25,30.45 108.8,28.9 111.1,28.9
  Top w2: v1@102.5,34.45 109.5,34.45 L1.2@112.75,31.2 112.75,31.5 107.2,37.05 107.2,43.5
  High speed w1: v1(53.55,121.25) 69.5,121.25 77.9,112.85 77.9,69.55 69.8,61.45 59.45,61.45 52.85,54.85 52.85,36.85 58.85,30.85 94,30.85 97.65,34.5 v1(102.5,34.5)
  other v1: 54.85,121.25
+24V: F1.2 F2.2 P3.4 | length 8.6
  Top w2: F1.2@124.45,57.5 124.45,54.65 124.871,54.229 P3.4@130.061,54.229
+24V_Pwr: D1.1 P1.1 R71.1 R72.1 R73.1 R74.1 R79.1 R80.1 R81.1 R85.1 R86.1 R87.1 R92.1 R94.1 R96.1 | length 338
  Top w0.3: R79.1@105.5,94.75 v1(106.85,94.75) ; R72.1@105.503,90.45 v1@106.75,90.45 ; R87.1@105.553,98.9 v1(106.7,98.9) ; R74.1@105.603,104.05 v1(107.25,104.05) ; R71.1@116.953,95.7 117.003,95.65 127.3,95.65 v1(128.95,97.3)
  Top w0.4: R86.1@105.5,108.6 107.85,108.6 109.45,107 v1(114.65,107) ; R85.1@116.65,90.8 117.7,90.8 119,89.5 128.5,89.5 v1(129.2,90.2) ; R81.1@116.653,101 117.35,101 118.7,99.65 v1(128.8,99.65) ; R73.1@122.45,119.2 122.45,117.75 v1(128.55,111.65) ; P1.1@132.65,112.885 133.303,113.538 R80.1@133.303,119.2
  Top w0.45: v1@32.5,55.4 R94.1@32.5,56.947 ; v1(32.5,62.2) R96.1@32.5,63.597 ; v1@32.65,48.2 R92.1@32.65,49.697
  Top w1: D1.1@122.55,61.45 v1(126.4,61.45)
  High speed w1: v1(32.5,62.2) 32.5,48.25 v1(32.6,48.15) 29.45,45 29.45,29.75 34.15,25.05 93.2,25.05 99.5,31.35 104.95,31.35 126.35,52.75 126.35,61.45 v1(126.4,61.45)
  Bottom w0.3: 128.65,103.55 128.8,103.55 ; v1@128.85,99.6 v1@129.15,99.6
  Bottom w0.5: v1(106.7,98.9) 109.182,98.9 109.382,99.1 110.418,99.1 110.618,98.9 116.2,98.9 116.9,99.6 v1@128.85,99.6 ; v1(106.8,90.4) 107.65,89.55 128.35,89.55 ; v1(106.85,94.75) 116.5,94.75 117.45,95.7 129.05,95.7 ; 107.25,103.2 107.45,103.4 128.65,103.4 ; v1(114.65,107) 128.8,107 129.35,107.55
  Bottom w2: 130.385,112.885 P1.1@132.65,112.885
  other v1: 32.45,55.35
A1: Dip1.12 R98.1 | length 2.5
  Top w0.5: Dip1.12@32.557,33.788 35.034,33.788 R98.1@35.084,33.838
A2: Dip1.13 R99.1 | length 2.5
  Top w0.5: Dip1.13@32.557,36.328 35.074,36.328 R99.1@35.084,36.338
A3: Dip1.14 R100.1 | length 2.5
  Top w0.5: Dip1.14@32.557,38.868 35.064,38.868 R100.1@35.084,38.888
A4: Dip1.15 R101.1 | length 2.6
  Top w0.5: Dip1.15@32.557,41.408 34.914,41.408 R101.1@35.084,41.238
A5: Dip1.16 R102.1 | length 2.6
  Top w0.5: Dip1.16@32.557,43.948 34.974,43.948 R102.1@35.084,43.838
GND: C2.1 C3.1 C4.1 C5.1 C6.2 C7.2 C8.2 C9.2 C10.2 C11.2 C12.2 C13.1 C14.2 C15.1 C16.1 C17.1 C24.1 C25.1 C26.1 C27.1 C28.1 C29.1 C30.1 C31.1 C32.1 C33.1 C34.1 C35.1 C36.1 C37.1 C38.1 C39.1 C40.1 C41.1 C42.1 C43.1 C44.1 C45.1 C46.1 C47.1 C48.1 C49.1 C50.1 D3.2 D10.1 D11.1 D12.1 D13.1 D14.1 D15.1 D16.1 D17.1 D18.1 D19.1 D20.1 D21.1 D22.1 D24.1 D26.1 D28.1 J1.10 P1.2 P3.5 PL1.1 PL2.1 PL3.1 PL4.1 PL5.1 PL6.1 PL7.5 PL8.1 R3.1 R4.1 R11.1 R19.2 R24.1 R26.1 R30.1 R33.1 R37.1 R40.1 R75.1 R76.1 R77.1 R78.1 R82.1 R83.1 R84.1 R88.1 R89.1 R90.1 R93.1 R95.1 R97.1 R98.2 R99.2 R100.2 R101.2 R102.2 SD1.6 T1.2 T2.2 T3.2 T4.2 T5.2 T6.2 TVS1.2 TVS3.1 TVS4.1 TVS5.1 TVS6.1 TVS7.1 U1.6 U1.TP U2.1 U3.1 U4.1 U5.1 U5.3 U6.1 U6.3 U7.1 U7.3 U8.5 U9.2 U10.4 U10.5 U11.4 U11.6 U12.2 U13.4 U13.5 U14.4 U14.6 U15.2 U16.2 U17.4 U17.5 U18.4 U18.6 U19.2 U20.2 U21.1 U21.3 U21.4 U21.5 U21.8 U21.12 U21.13 U22.7 U23.1 U23.3 U23.4 U23.8 U23.12 U23.13 U24.1 U24.3 U24.4 U24.8 U24.12 U24.13 U25.22 U25.53 U25.63 U26.1 U26.3 U*1.3 U*2.3 U*3.3 U*4.3 U*5.3 U*6.3 XTL1.2 | length 351.1
  Top w0.25: v1(92.15,77.25) 92.6,77.25 93.35,78 U26.3@95.65,78 96.3,78 96.75,78.45 96.75,79.55 96.4,79.9 U26.1@95.65,79.9 ; C13.1@117.15,79.7 117.3,79.55 SD1.6@119.05,79.55 ; TVS1.2@124.1,49.75 TVS1.2@124.35,49.75 ; U1.TP@124.4,34.7 125.4,33.7 U1.TP@125.4,34.15 ; U1.6@127.1,34.065 128.085,34.065 129,33.15 C6.2@129.5,33.15
  Top w0.3: R98.2@36.887,33.838 R99.2@36.887,36.338 R100.2@36.887,38.888 R101.2@36.887,41.238 R102.2@36.887,43.838 v1@38.088,43.838 ; v1(38.25,63.2) 38.25,64.747 C40.1@38.3,64.797 ; C36.1@60.95,52.603 61.153,52.4 XTL1.2@62.8,52.4 v1@62.8,53.65 ; v1(63.65,45.15) 63.65,45.6 64.5,46.45 U25.22@64.5,47.8 XTL1.2@64.5,51.1 ; XTL1.2@64.45,51.15 XTL1.2@64.5,51.1 ; C37.1@66.1,50.847 64.753,50.847 XTL1.2@64.5,51.1 ; U*6.3@71.1,105.46 v1@72.19,105.46 ; U*2.3@71.2,92.096 v1@72.596,92.096 ; U*4.3@71.2,98.378 v1@72.572,98.378 ; U*1.3@71.3,72.85 v1@72.55,72.85 ; U*3.3@71.3,79.332 v1@72.668,79.332 ; U*5.3@71.3,85.764 v1@72.686,85.764 ; v1(85.05,106.5) 85.05,107.275 U21.8@85.125,107.35 ; U24.8@85.125,83.85 86.55,83.85 87.1,84.4 v1(87.1,85.3) 87.1,85.75 86.4,86.45 U24.4@85.125,86.45 U24.3@85.125,87.1 ; U24.1@85.125,88.4 85.2,88.475 v1(85.2,89.45) ; U23.8@85.125,95.6 85.125,94.975 v1(85.65,94.45) ; U23.4@85.125,98.2 U23.3@85.125,98.85 86.25,98.85 86.55,99.15 86.55,99.95 86.35,100.15 U23.1@85.125,100.15 v1(85.125,101.075) ; U21.5@85.125,109.3 86.5,109.3 v1@87.15,109.95 ; U21.4@85.125,109.95 v1@87.15,109.95 ; U21.3@85.125,110.6 86.6,110.6 v1(87.2,110) v1@87.15,109.95 ; U21.1@85.125,111.9 v1@85.125,113.075 ; U10.5@89.347,166.27 v1(89.347,167.4) ; C46.1@90.65,103.45 v1(91.95,103.45) ; U21.12@90.665,109.3 U21.12@90.675,109.29 U21.13@90.675,109.94 92.54,109.94 v1(93.1,110.5) ; U24.12@90.675,85.79 U24.13@90.675,86.44 92.94,86.44 v1(93.05,86.55) ; U23.12@90.675,97.54 U23.13@90.675,98.19 92.16,98.19 v1(92.45,97.9) ; C45.1@90.7,91.603 v1@92.147,91.603 ; C44.1@90.7,115.6 v1@92,115.6 ; U10.4@94.747,166.27 v1@94.747,167.25 ; U4.1@98.8,25.85 98.9,25.95 C12.2@103.15,25.95 ; v1(98.85,91.75) 99.1,92 100.15,92 D14.1@100.5,92.35 D14.1@100.85,92.7 ; v1(98.95,101.1) 99.45,101.6 D13.1@100.55,101.6 101,102.05 102.053,102.05 C27.1@102.3,102.297 102.3,102.2 103.25,101.25 104.65,101.25 105.6,102.2 R78.1@105.6,102.5 ; v1(99,105.75) 99.65,105.75 100.15,106.25 D18.1@100.5,106.25 100.85,105.9 102.3,105.9 ; v1(99.05,96.1) 99.05,96.2 99.35,96.5 D19.1@100.5,96.5 101.653,96.5 C33.1@102.3,97.147 103.047,96.4 104.4,96.4 105.4,97.4 R90.1@105.55,97.4 ; v1@100.45,86.7 D11.1@100.45,88.035 ; R19.2@102.2,70.45 v1@102.2,71.5 ; C25.1@102.25,88.697 101.588,88.035 D11.1@100.45,88.035 ; C28.1@102.25,92.997 101.953,92.7 D14.1@100.85,92.7 ; C32.1@102.25,106.9 102.3,106.85 102.3,105.9 ; R82.1@105.5,93.25 104.45,92.2 101.753,92.2 101.253,92.7 D14.1@100.85,92.7 ; R89.1@105.5,107.1 104.3,105.9 102.3,105.9 ; R76.1@105.503,89 104.253,87.75 100.735,87.75 D11.1@100.45,88.035 ; v1(109.9,97.85) 109.9,97.9 110.3,98.3 111.35,98.3 D16.1@111.65,98.6 111.8,98.45 112.603,98.45 C30.1@113.4,99.247 113.4,99.1 114.15,98.35 115.5,98.35 R84.1@116.65,99.5 ; v1(110,93.1) 110.45,93.55 D10.1@111.65,93.55 ; C3.1@110.65,25.45 C2.1@112.8,25.45 C4.1@114.85,25.45 ; D17.1@111.65,89.1 111.697,89.147 C31.1@113.45,89.147 113.7,88.897 113.7,88.3 114.15,87.85 115.95,87.85 116.45,88.35 116.45,88.6 116.7,88.85 R88.1@116.7,89.1 v1(117.65,88.15) ; U6.3@112.9,84.65 112.95,84.7 113.8,84.7 114.15,85.05 114.15,86.05 113.65,86.55 U6.1@112.9,86.55 ; R75.1@113.4,94.2 112.75,93.55 D10.1@111.65,93.55 ; C24.1@116.65,94.45 116.65,94.4 115.45,93.2 112,93.2 D10.1@111.65,93.55 ; v1@117.35,117.35 D12.1@117.35,118.6 117.6,118.85 118.95,118.85 C26.1@119.15,119.05 ; T2.2@117.7,151.15 v1(119.15,151.15) ; v1@121.9,165.35 T3.2@123.25,165.35 ; R77.1@122.45,120.75 122.75,121.05 124,121.05 v1(124.45,121.5) ; D3.2@123.8,39.1 124.4,38.5 U1.TP@124.4,34.7 ; v1(128.2,116.8) D15.1@128.2,118.3 128.5,118.6 129.653,118.6 C29.1@130,118.947 ; C6.2@129.5,33.15 130,33.15 C6.2@130.35,32.8 130.75,33.2 132.35,33.2 C5.1@132.55,33.4 ; v1(132.95,122.2) 133.3,121.85 R83.1@133.3,120.666
  Top w0.4: U25.53@59.7,32.5 59.7,31.25 61.15,29.8 v1@61.15,27.2 ; v1(65.7,28) 67.097,28 C34.1@67.15,27.947 ; U25.63@67.7,32.5 67.7,31.25 68.55,30.4 68.55,29.8 68.65,29.7 v1(68.65,28.2) ; C35.1@70.05,51.85 70.05,53.097 C50.1@70.253,53.3 70.15,53.403 v1(70.15,54.85) ; U9.2@90.003,126.792 90.003,127.653 90.6,128.25 v1(90.95,128.25) ; R26.1@98.2,166.6 v1(98.2,168.047) ; v1@101.697,161.2 U11.4@101.697,162.46 ; v1(105.297,163.9) 105.467,163.73 U11.6@107.097,163.73 ; C41.1@108.55,167.75 v1@109.897,167.75
  Top w0.45: U17.5@36.45,166.69 36.45,167.3 36.9,167.75 v1(36.9,167.9) ; D20.1@36.8,51.2 37.8,51.2 ; v1(38.15,49.55) 37.8,49.9 37.8,51.2 ; C38.1@38.547,51.2 37.8,51.2 ; U17.4@41.85,166.69 v1(41.85,168.15) 42.903,168.15 R40.1@43.85,167.203 ; U18.4@47.4,162.88 48.22,162.88 v1(49,162.1) ; v1(50.75,164.9) 51.5,164.15 U18.6@52.8,164.15 ; C43.1@52.503,168.45 v1(54.15,168.45) ; v1(53.2,160.8) 53.603,160.397 C42.1@54.8,160.397 ; U13.5@60.45,166.87 60.45,167.7 v1(60.55,167.8) ; U13.4@65.85,166.87 67.317,166.87 67.85,167.403 R33.1@67.9,167.353 67.9,167.5 v1(66.75,168.65) ; v1@69.76,163.06 U14.4@71.45,163.06 ; v1@75.02,164.33 U14.6@76.85,164.33 ; C17.1@76.553,168.6 v1(77.8,168.6) ; C16.1@80.75,165.5 v1@80.75,166.85 ; C47.1@102.7,113.55 102.75,113.5 v1(106.7,113.5) ; U22.7@106.3,122.81 v1(106.3,123.9) ; v1(107.85,68.55) v1@108.05,68.35 ; C14.2@108.05,72.75 v1@108.05,68.35 ; v1(109.05,158.55) 109.05,159.953 C15.1@109.097,160 ; U8.5@109.95,67.23 108.72,67.23 108.05,67.9 v1@108.05,68.35 ; v1(114.25,168.9) 115.7,168.9 T1.2@115.8,169 ; R11.1@124.2,158.45 v1(125.65,158.45)
  Top w0.5: v1(29.3,56.85) 30.85,56.85 R95.1@30.95,56.95 ; v1(29.45,49.75) 31.047,49.75 R93.1@31.1,49.697 ; v1@29.703,63.597 R97.1@30.95,63.597 ; D22.1@36.5,65.05 36.753,64.797 C40.1@38.3,64.797 ; D21.1@36.55,58.5 36.85,58.2 C39.1@38.35,58.2 v1(38.35,56.45) ; U15.2@74.015,126.792 74.015,127.915 v1(74.3,128.2) ; U16.2@78.012,126.792 v1@78.012,128.288 ; U19.2@82.009,126.792 82.009,127.959 v1(82.4,128.35) ; U20.2@86.006,126.792 v1@86.006,128.006 ; U12.2@94,126.792 94,127.85 v1(94.45,128.3) ; U5.3@110.95,80.65 111.05,80.55 v1(111.05,79.8) 111.6,79.25 U7.1@111.6,77.95 112.65,77.95 112.95,77.65 112.95,76.5 112.5,76.05 U7.3@111.6,76.05 ; U5.1@110.95,82.55 110.8,82.7 v1(110.8,83.7) 112,83.7 U6.3@112.9,84.6 ; v1(115.75,79.05) 116.5,79.05 C13.1@117.15,79.7
  Top w0.8: D28.1@48.75,148.25 48.863,148.25 T6.2@52.12,151.507 ; D26.1@72.7,148.45 73.277,148.45 T5.2@76.377,151.55 ; D24.1@97.7,148.45 100.64,151.39 T4.2@100.64,151.507
  Top w1: R37.1@45.85,154.1 45.85,152.8 46.65,152 TVS7.1@46.65,151.5 46.657,151.507 T6.2@52.12,151.507 ; v1(50.35,125.85) U2.1@57.45,125.85 ; R30.1@69.95,154.35 69.95,153 70.65,152.3 TVS6.1@70.65,151.55 T5.2@76.377,151.55 ; R24.1@94.25,154.05 94.7,153.6 94.7,151.65 TVS5.1@94.95,151.4 100.533,151.4 T4.2@100.64,151.507 ; U3.1@98.75,41.2 102.703,41.2 C10.2@102.9,41.397 104.247,41.397 v1(104.25,41.4) ; v1(110.2,65.6) 112.5,65.6 TVS3.1@113.1,66.2 ; TVS4.1@113.1,71.75 v1(114.8,71.75)
  Top w2: TVS1.2@124.35,49.75 129.46,49.75 P3.5@130.061,49.149
  HighSpeed w0.3: v1(104.6,25.55) v1(105.85,25.55)
  other v1: 61.15,27.15 131.55,31.55 133.05,31.65 123.6,33 125.2,33 123.6,34.75 125.25,34.75 123.55,36.45 125.25,36.45 38.1,43.85 62.75,53.7 29.65,63.6 102.1,71.65 72.6,72.8 72.7,79.3 72.65,85.75 100.3,86.55 92.15,91.6 72.6,92.1 72.6,98.35 72.2,105.45 85.15,113.1 92.05,115.65 117.4,117.3 51.7,125.9 86.25,128.3 78.2,128.35 101.747,161.15 69.73,163.07 75,164.35 121.85,165.35 80.6,167 94.747,167.3 110.05,168.05
MISO_3: SD1.7 U7.4 | length 5.7
  Top w0.5: U7.4@114.3,76.05 115.3,76.05 117.7,78.45 SD1.7@119.05,78.45
MOSI_3: SD1.3 U6.4 | length 4.2
  Top w0.5: U6.4@115.6,84.65 116,84.65 117.8,82.85 SD1.3@119.05,82.85
NetC1_1: C1.1 D3.1 L1.1 U1.8 | length 20.5
  Top w0.3: L1.1@112.75,40.4 113.75,41.4 121.6,41.4 ; C1.1@121.4,40.1 121.4,41.2 121.6,41.4 ; U1.8@127.1,36.605 127.1,38.9 D3.1@127.3,39.1 126.85,39.55 126.85,40.6 126.05,41.4 121.6,41.4
NetC1_2: C1.2 U1.1 | length 1.7
  Top w0.25: U1.1@121.4,36.6 C1.2@121.4,38.297
NetC5_2: C5.2 C6.1 D2.1 R1.2 U1.7 | length 34.1
  Top w0.3: U1.7@127.1,35.335 128.085,35.335 128.45,35.7 129.95,35.7 C6.1@130.35,36.1 130.6,35.85 130.75,35.7 132.053,35.7 ; R1.2@128.95,28.5 v1@130.2,28.5 ; C5.2@132.55,35.203 132.053,35.7 ; v1(133.2,36.8) 132.1,35.7 132.053,35.7
  Top w1: D2.1@123.15,46.55 126.1,46.55 130.6,42.05 C6.1@130.6,35.85
  Bottom w0.3: v1(130.25,28.45) 130.25,33.85 v1(133.2,36.8)
NetC15_2: C15.2 PL2.2 R21.1 | length 29.9
  Top w0.45: v1(107.55,160.95) 108.244,160.95 C15.2@109.097,161.803 R21.1@109.097,163.197
  HighSpeed w0.45: PL2.2@94,144.35 94,145.45 95.45,146.9 103,146.9 107.4,151.3 107.4,160.8 v1(107.55,160.95)
NetC16_2: C16.2 PL3.2 R28.1 | length 31.3
  Top w0.45: R28.1@79.15,163.7 80.747,163.7 C16.2@80.75,163.697 v1@81.997,163.697
  HighSpeed w0.45: PL3.2@69.7,144.45 69.7,145.35 71.55,147.2 78.5,147.2 82.03,150.73 v1(82.03,163.72)
NetC17_2: C17.2 PL3.3 R31.1 | length 39.6
  Top w0.45: R31.1@73.25,168.6 74,168.6 ; v1@74,166.7 74,168.6 ; C17.2@74.75,168.6 74,168.6
  HighSpeed w0.45: PL3.3@67.16,144.45 67.16,146.16 69.5,148.5 77.7,148.5 80.4,151.2 80.4,162.05 75.73,166.72 v1(73.98,166.72)
NetC18_1: C18.1 P2.1 R46.1 U*1.2 | length 48.5
  Top w0.5: v1(62.95,72.45) 60.65,72.45 R46.1@60.8,72.6 61.05,72.6 62.15,73.7 62.753,73.7 C18.1@62.9,73.847 63.047,73.7 63.95,73.7 U*1.2@64.8,72.85
  High speed w0.5: P2.1@26.05,82.555 32.505,76.1 59.3,76.1 v1(62.95,72.45)
NetC18_2: C18.2 R43.2 R46.2 U*1.1 | length 6.9
  Top w0.4: R43.2@58.05,75.35 60.55,75.35 R46.2@60.8,75.6 64.59,75.6 U*1.1@64.8,75.39
NetC19_1: C19.1 P2.7 R50.1 U*2.2 | length 44.9
  Top w0.5: R50.1@60.85,91.85 60.84,91.84 R50.1@60.75,91.84 60.76,91.85 v1(63,91.85) ; R50.1@61.05,91.85 62.447,93.247 C19.1@63,93.247 63.549,93.247 U*2.2@64.7,92.096
  High speed w0.5: P2.7@26.05,93.96 33.29,93.96 35.2,92.05 62.8,92.05 v1(63,91.85)
NetC19_2: C19.2 R47.2 R50.2 U*2.1 | length 7.2
  Top w0.5: R47.2@57.65,94.55 60.5,94.55 60.75,94.8 64.54,94.8 U*2.1@64.7,94.64